# Altium PCB PCB1.PcbDoc (part 1 of 7)
Units mil, origin at the board's own origin, x right, y up, seen from the top; angles counter-clockwise.
Board outline 2100 x 2700 mil, 6 copper layers (Top Layer, Layer 2, Layer 3, Layer 4, Layer 5, Bottom Layer), stack 32.112 mil thick; 200 components, 319 nets, 1280 pads, 807 vias.
Unrouted connection lines stored in the file: 4.
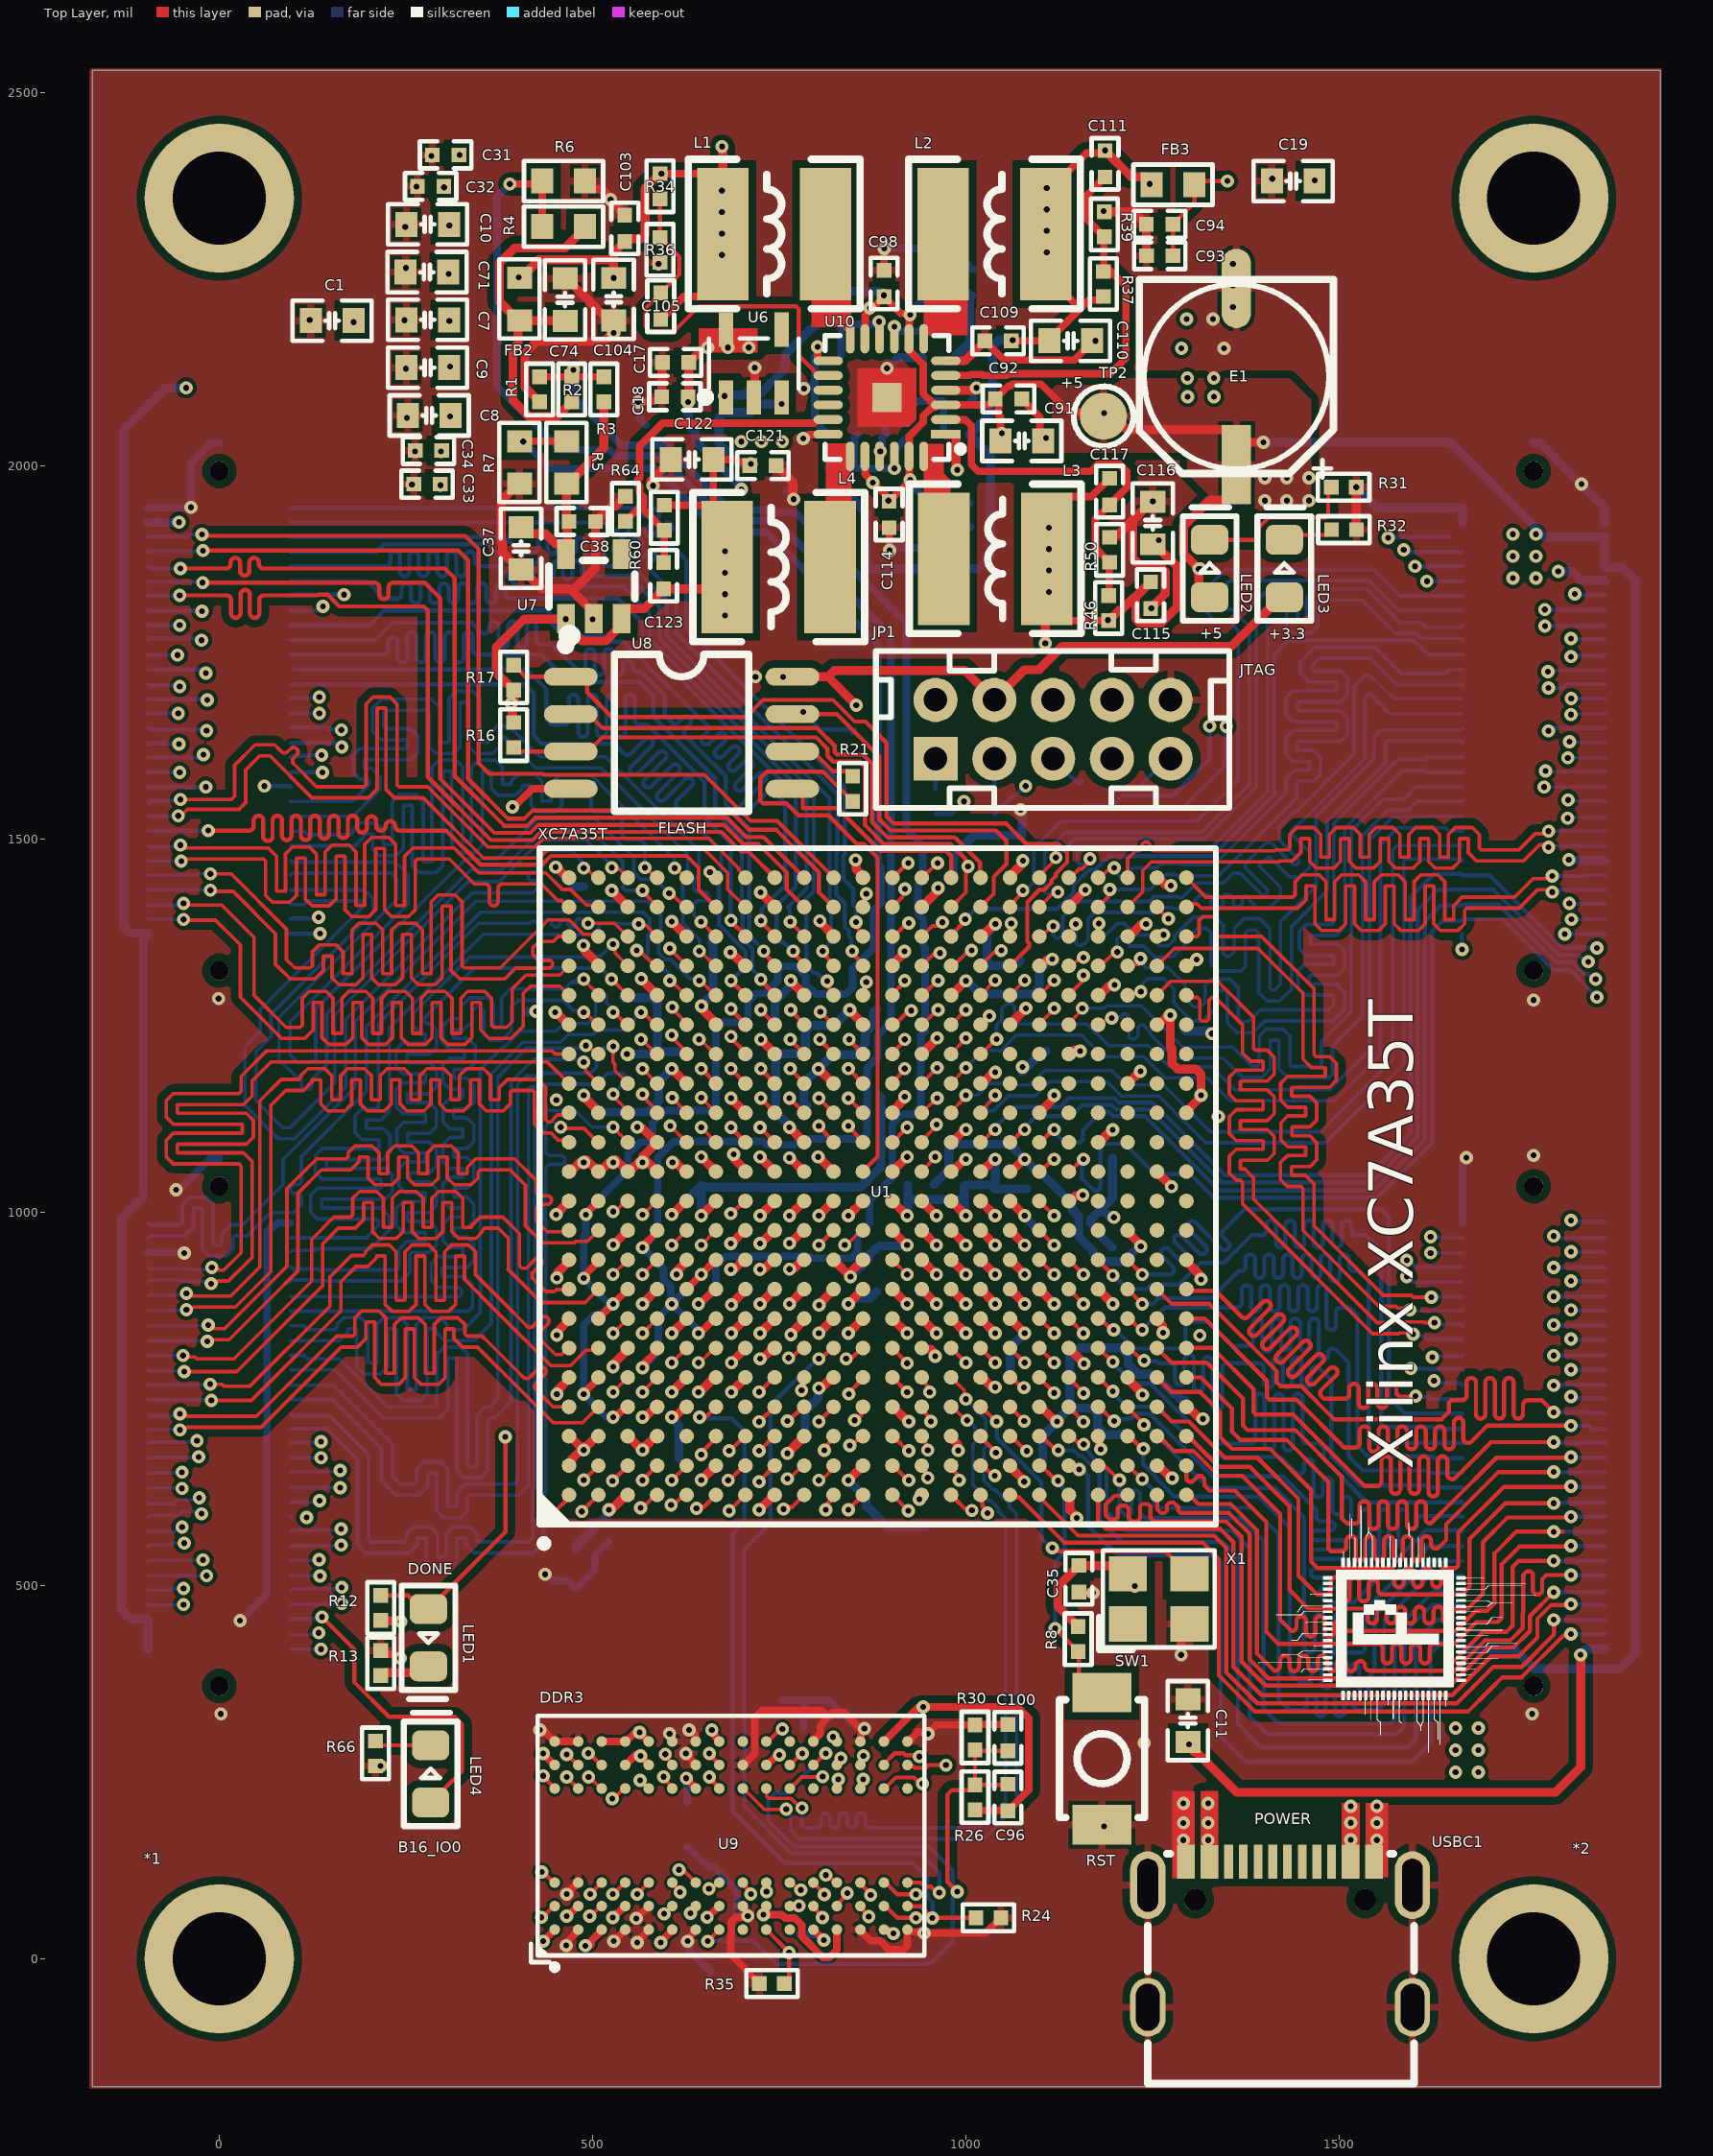
[diagram p0: Top Layer view]
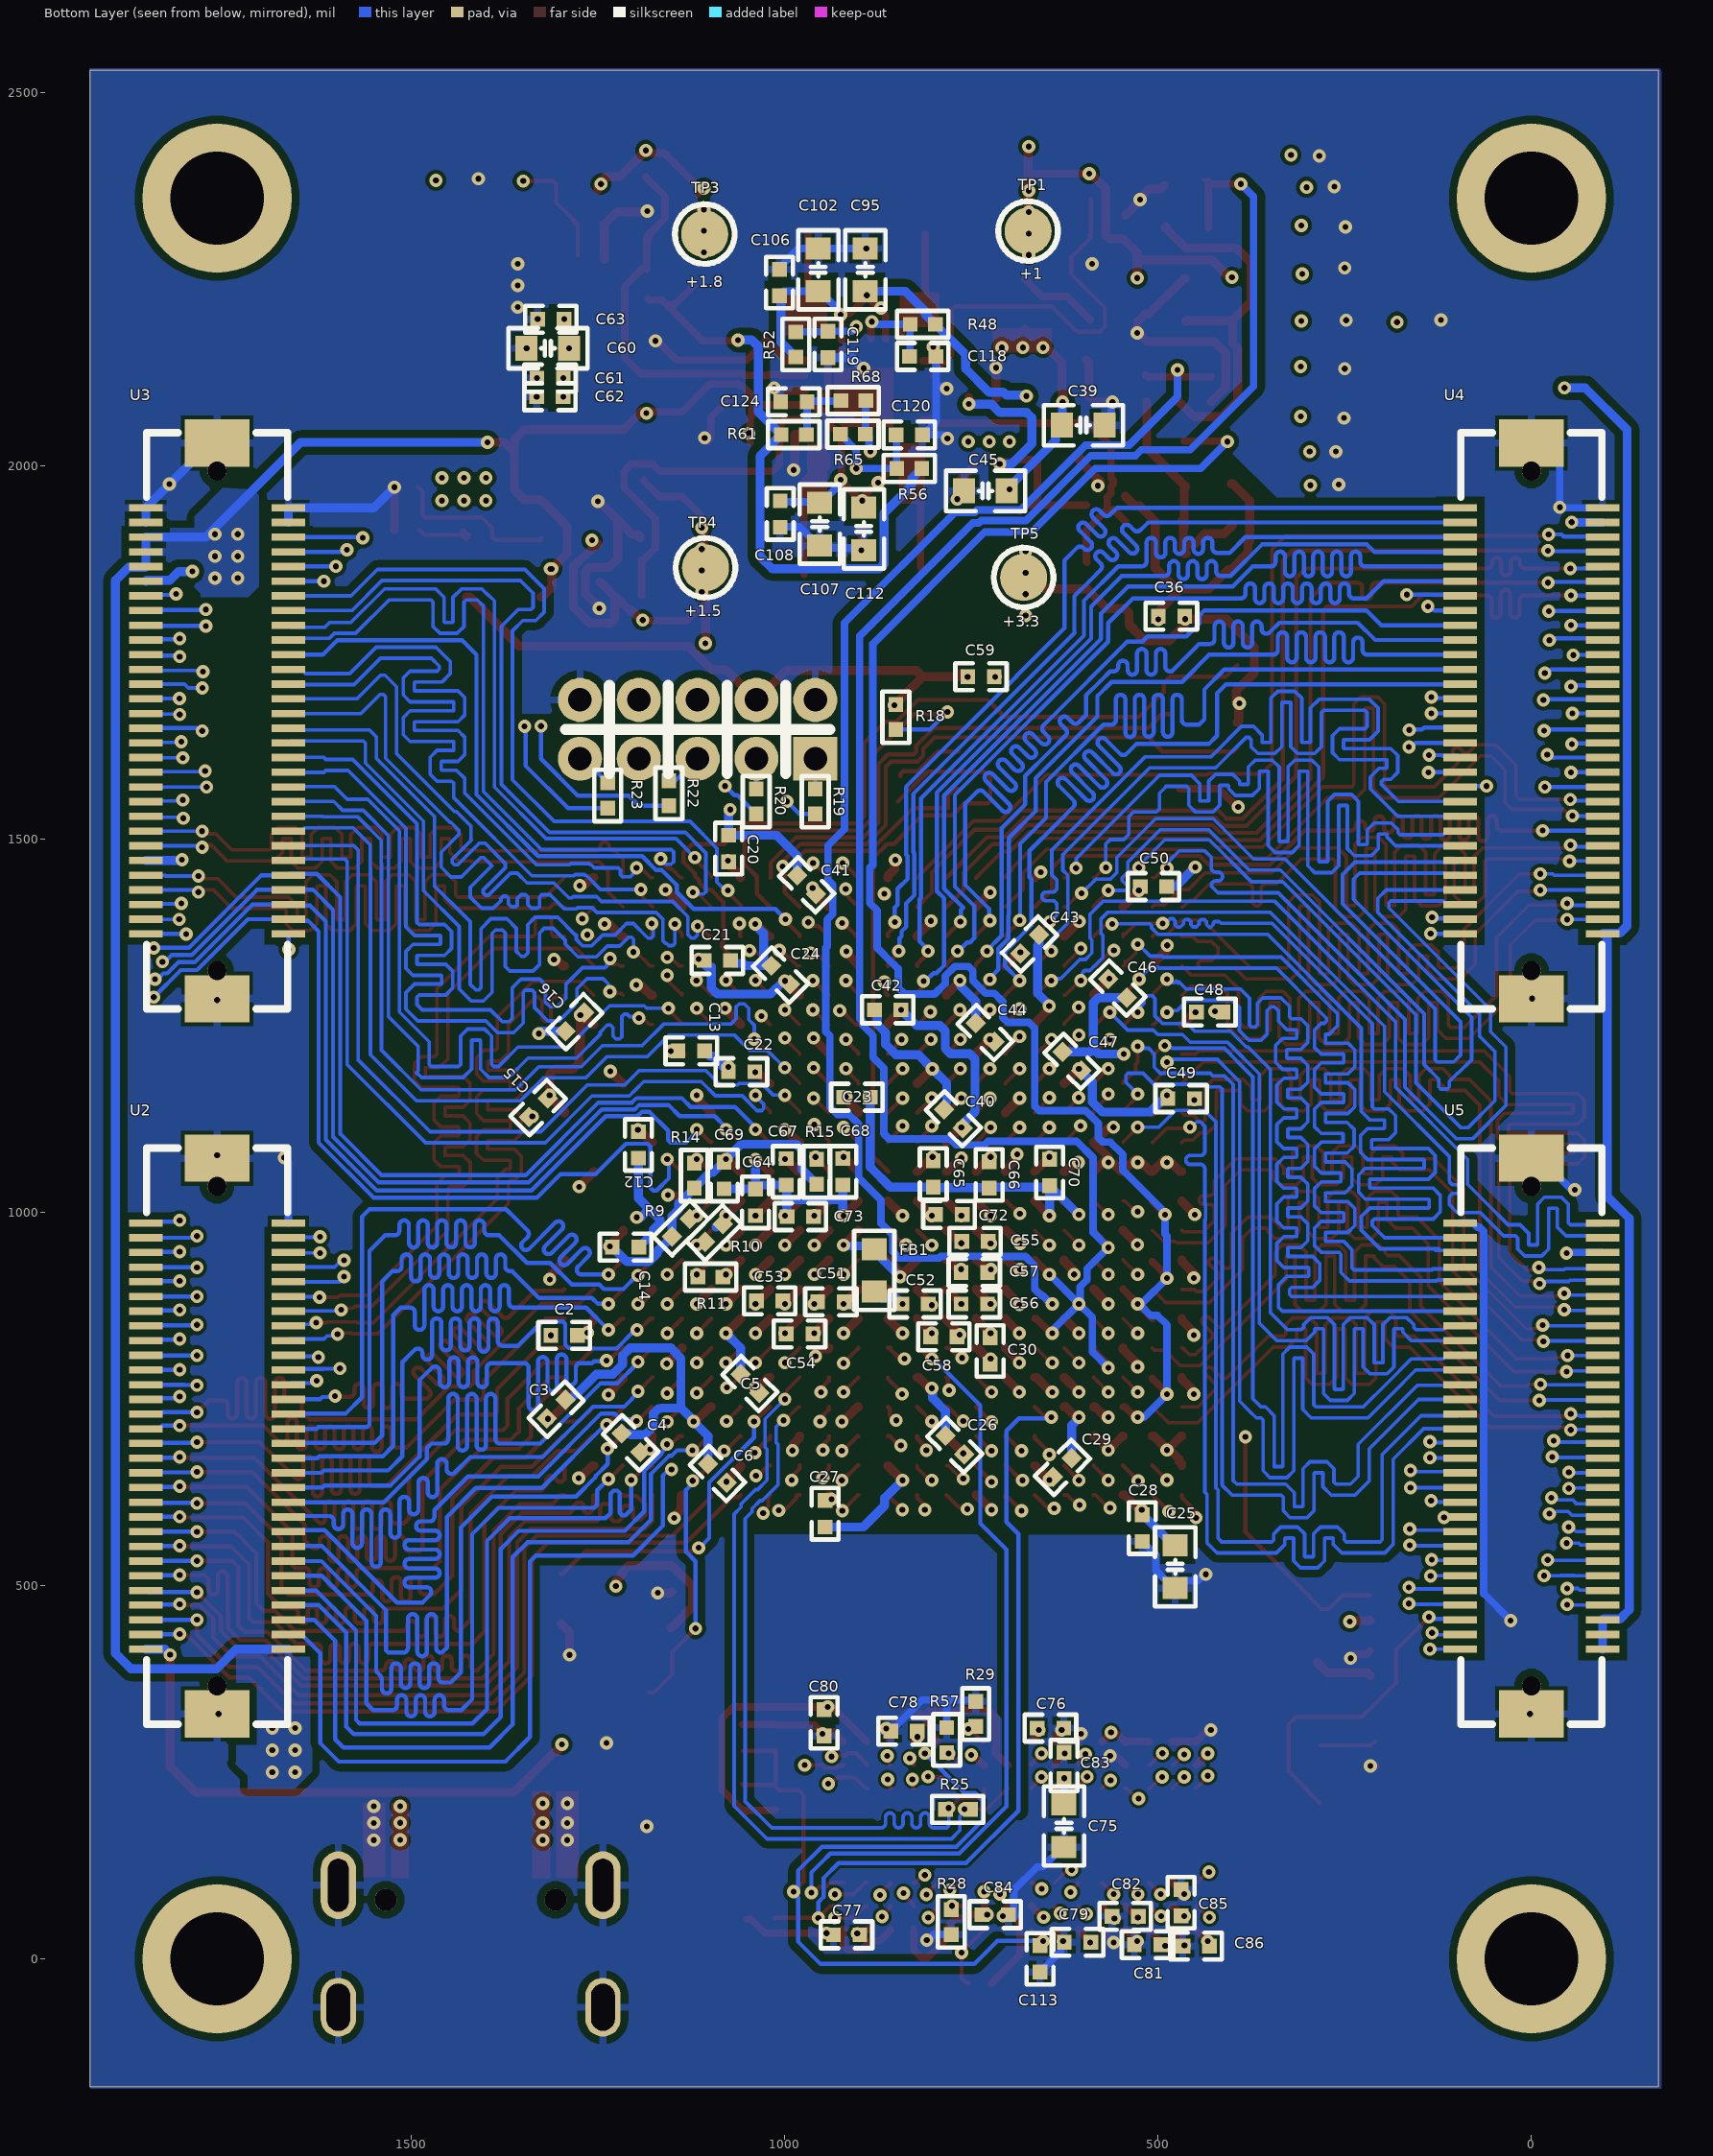
[diagram p1: Bottom Layer view, seen from below]
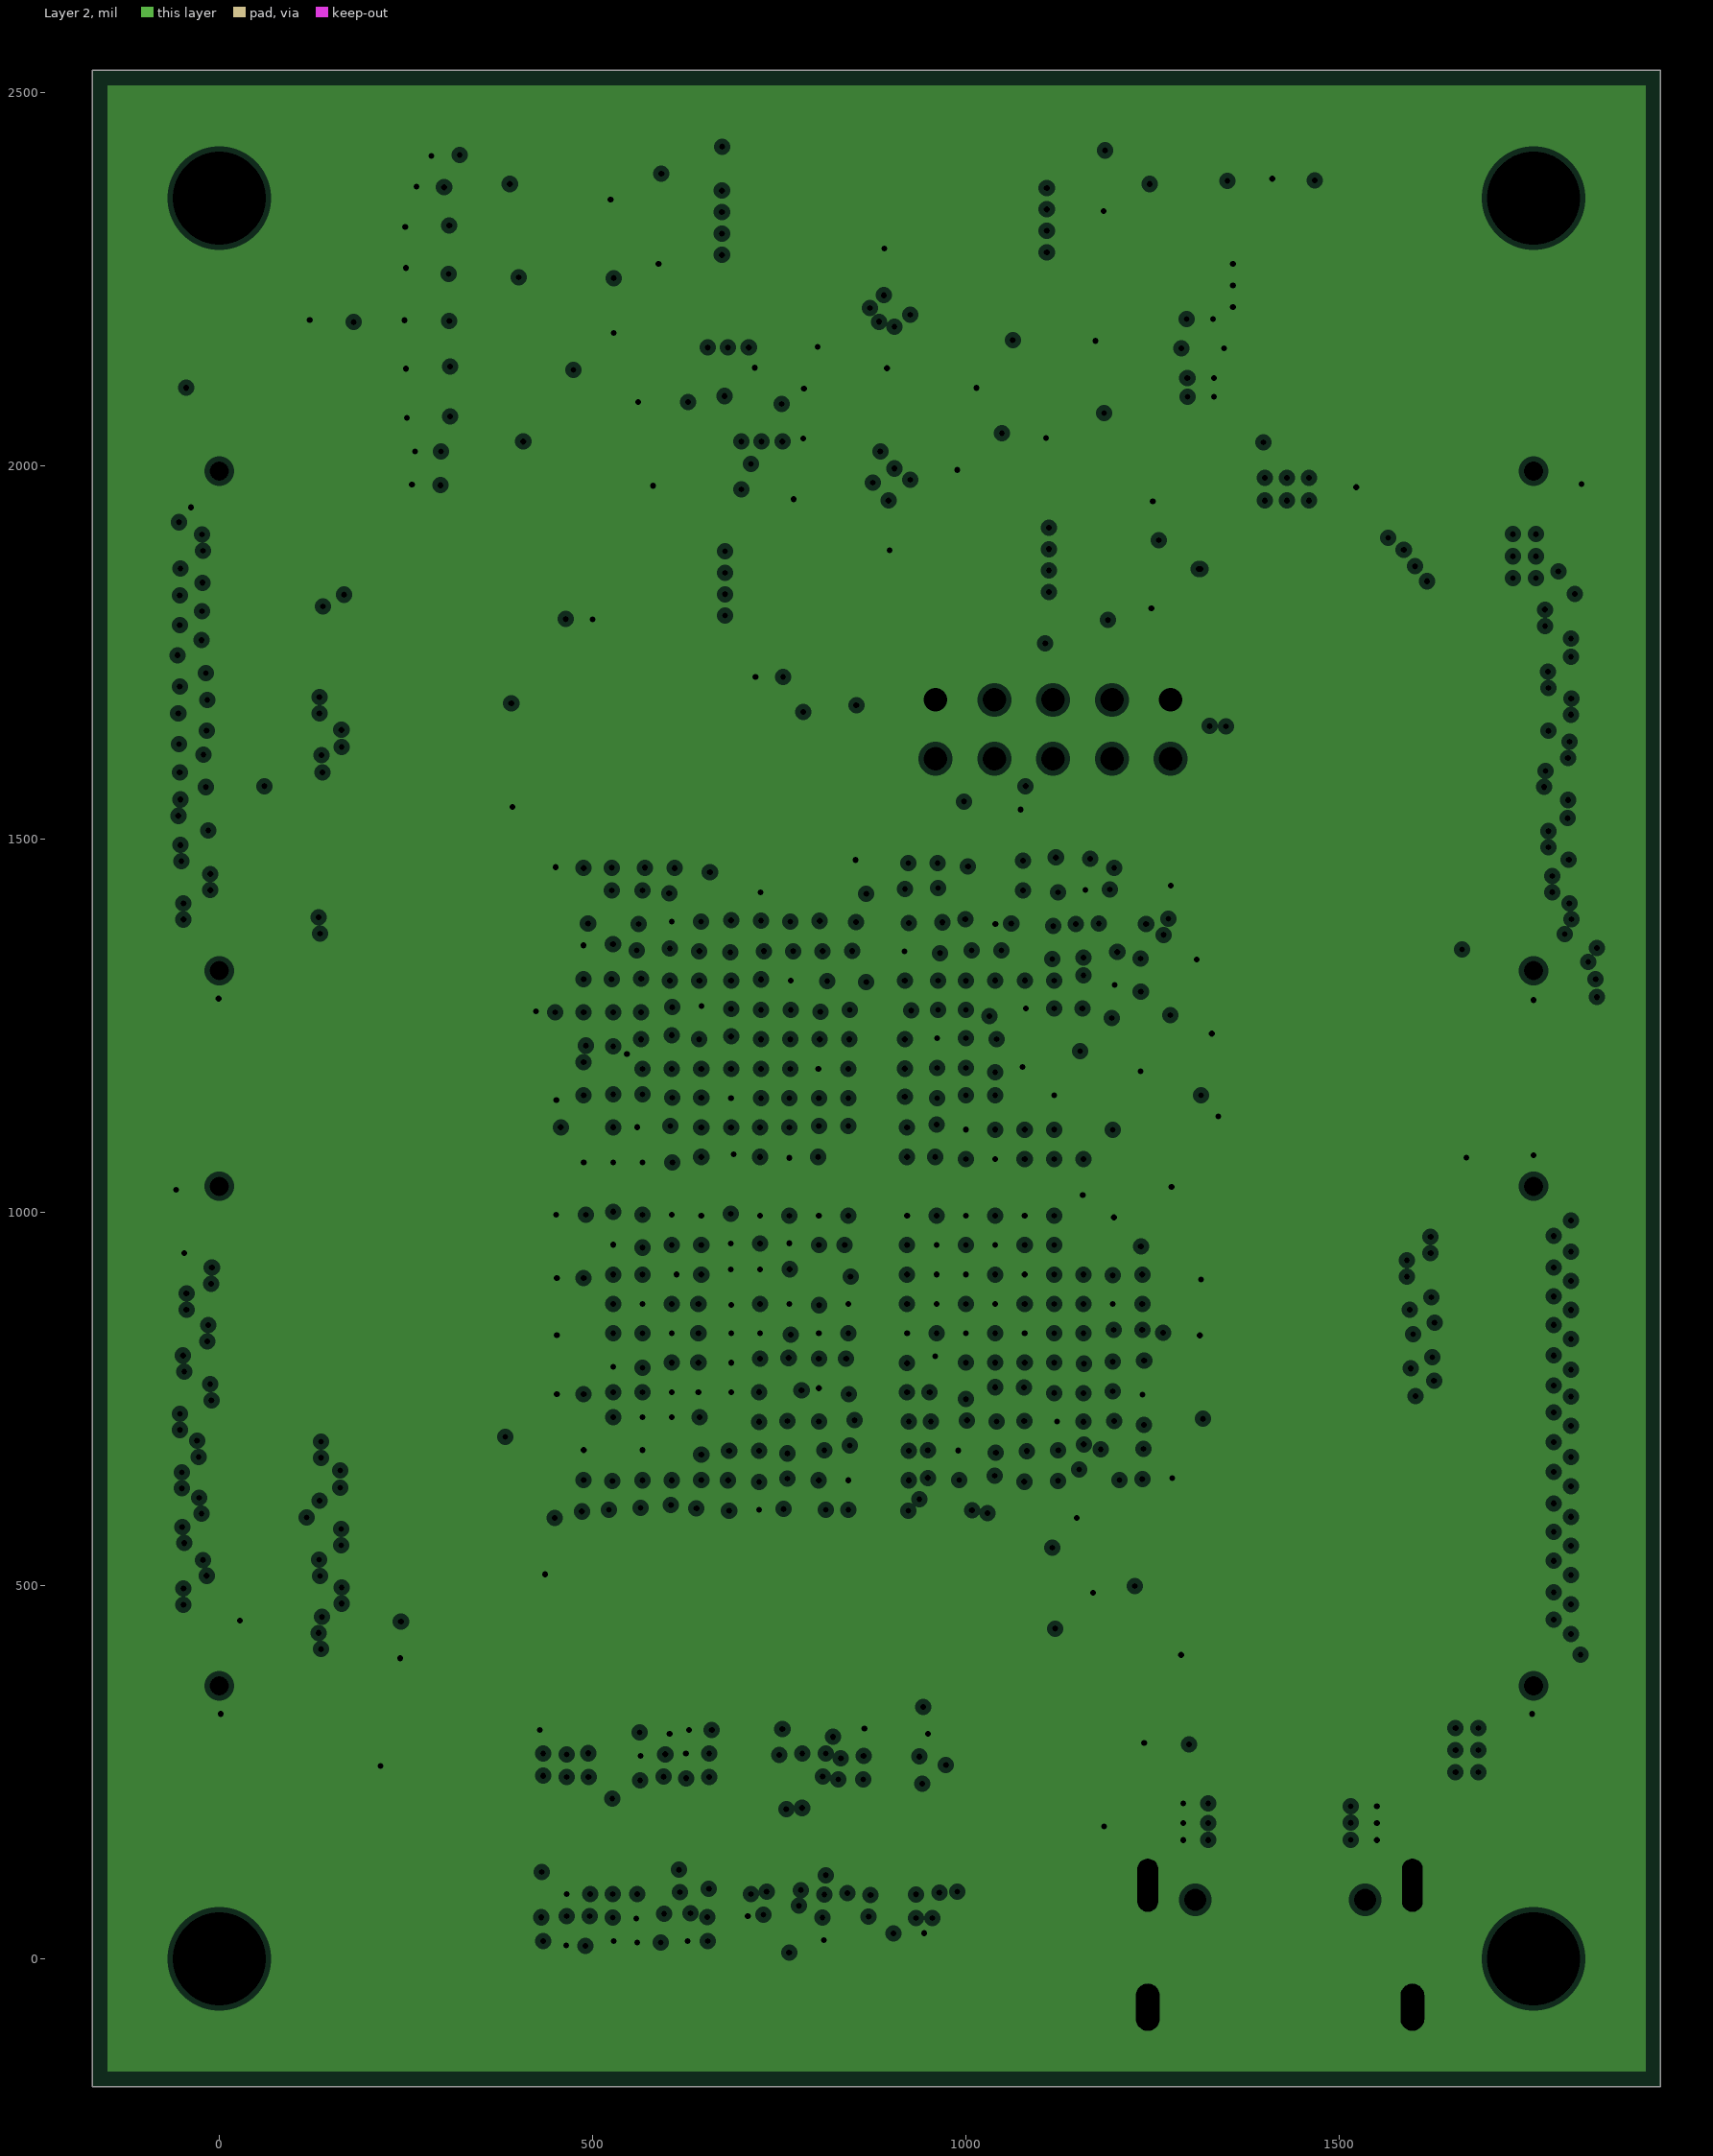
[diagram p2: Layer 2, clearances drawn from the general rule]
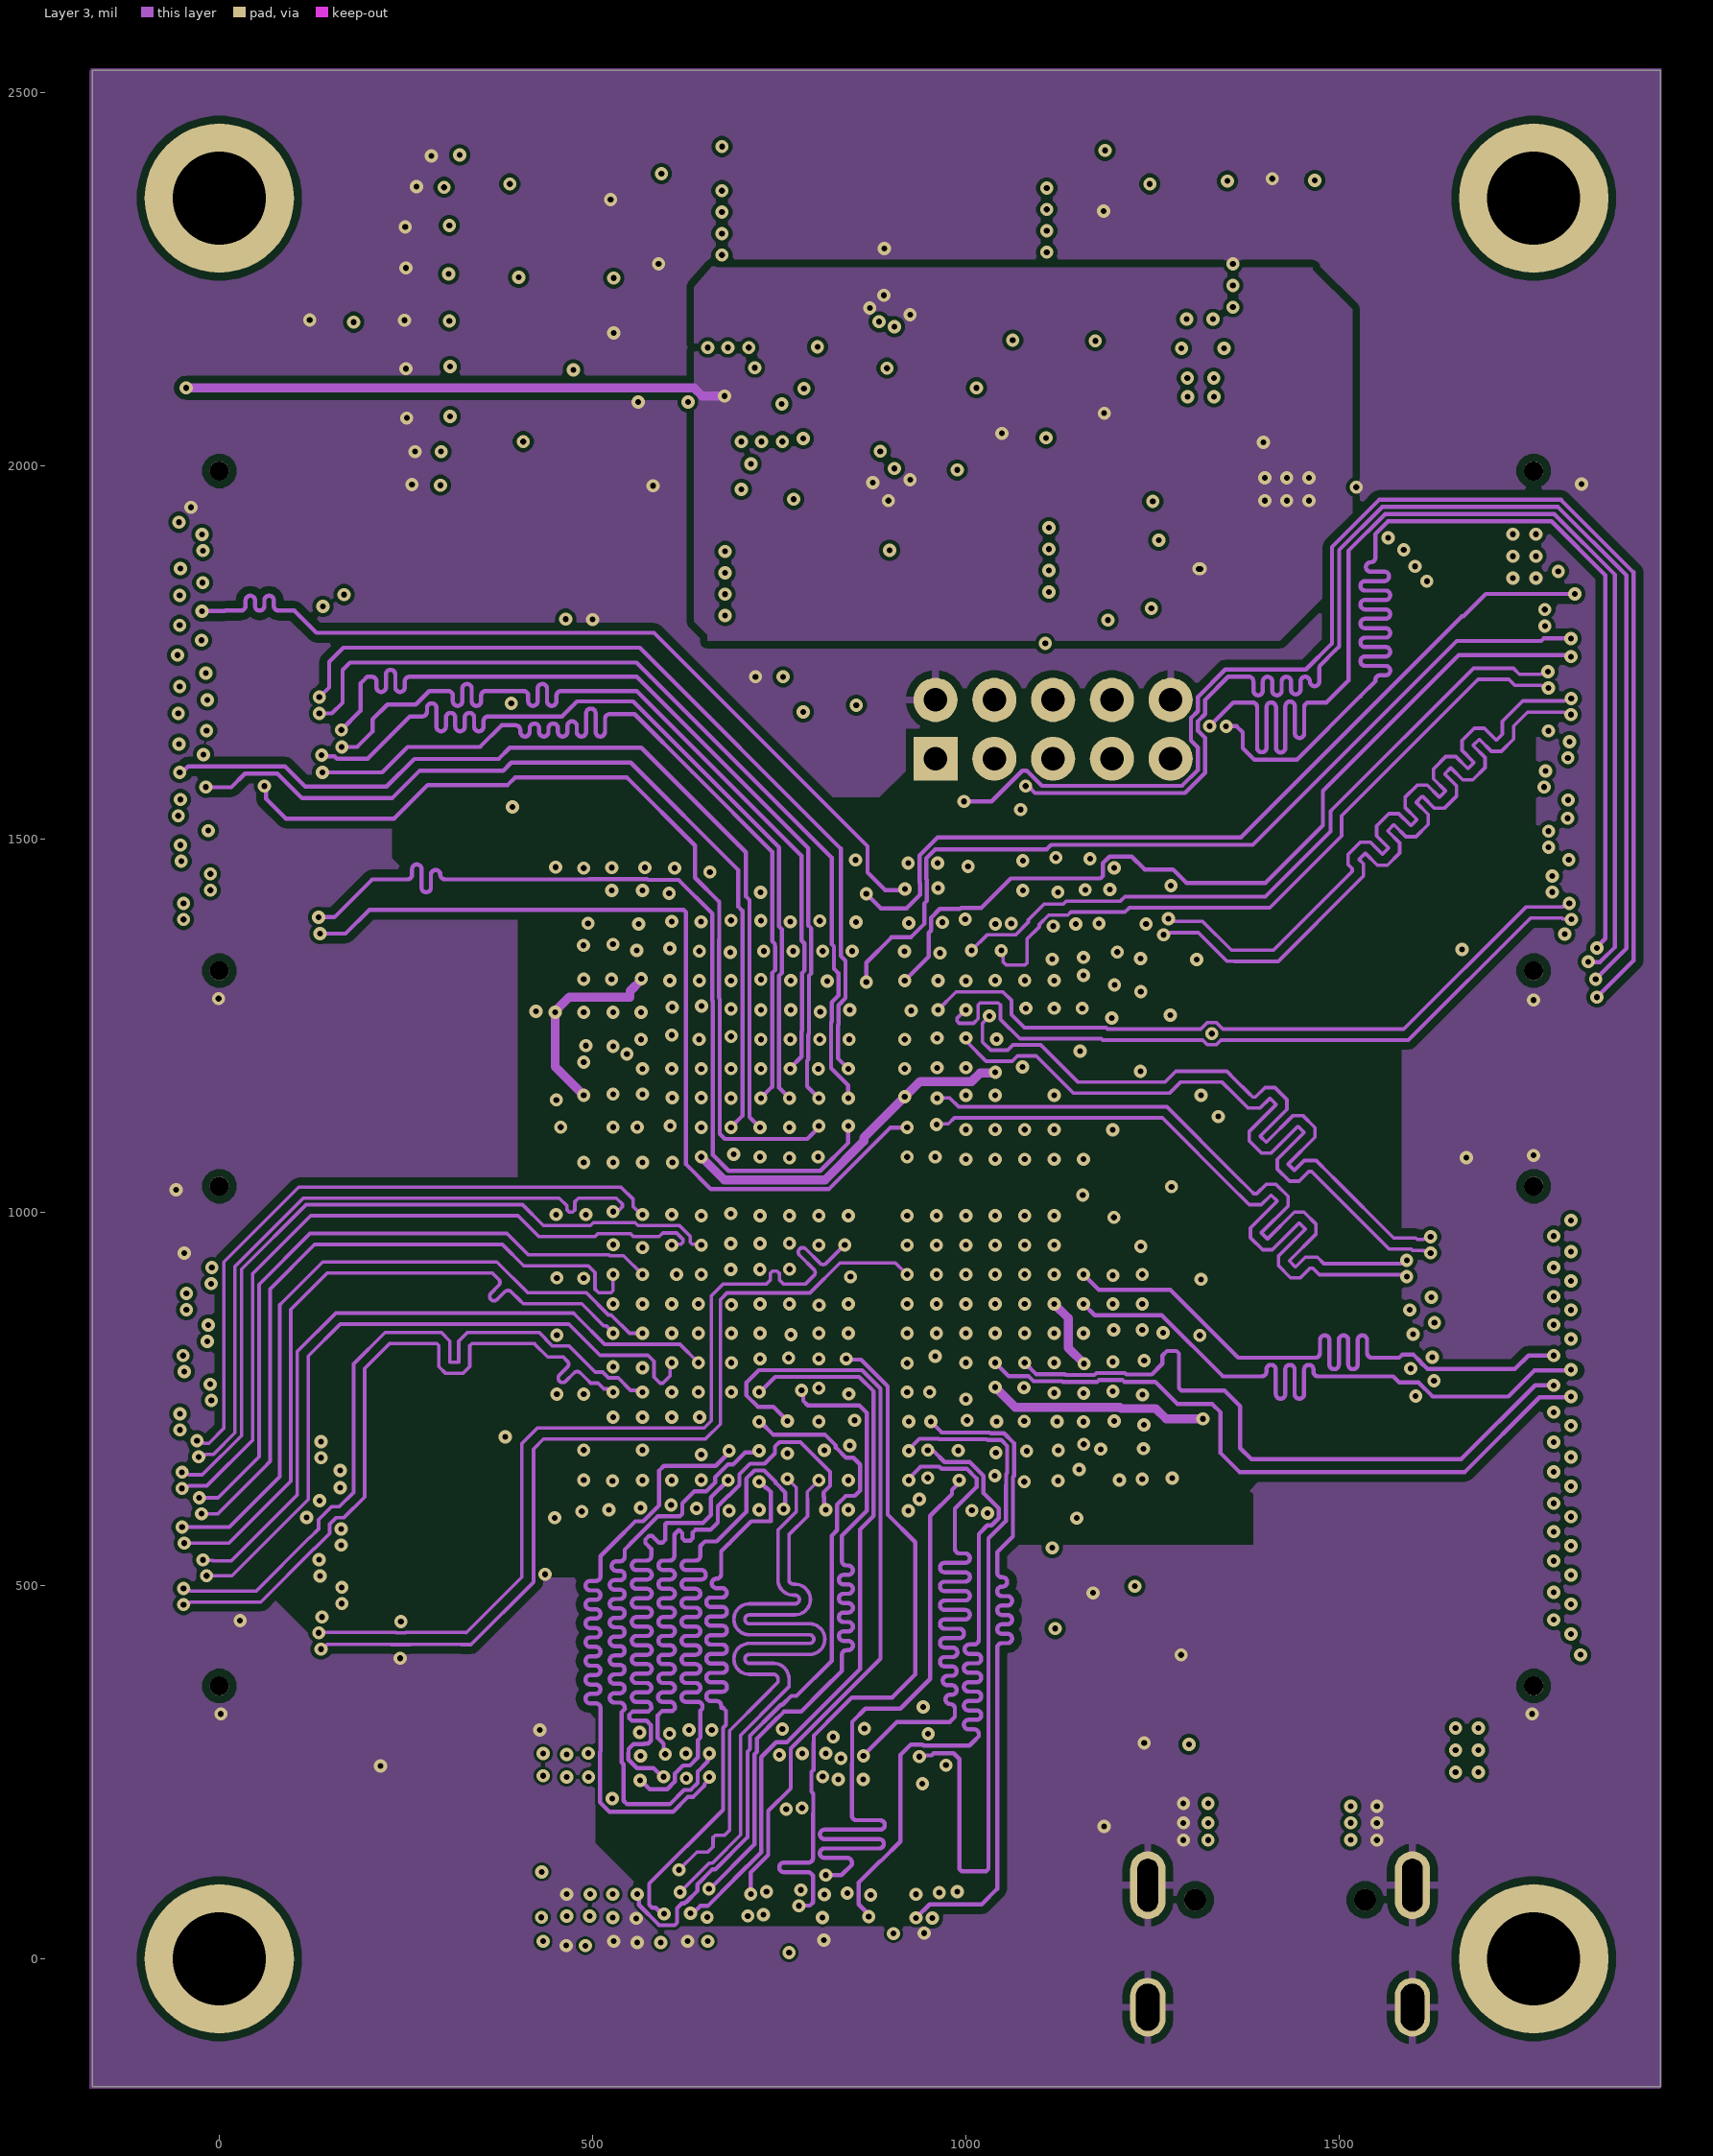
[diagram p3: Layer 3]
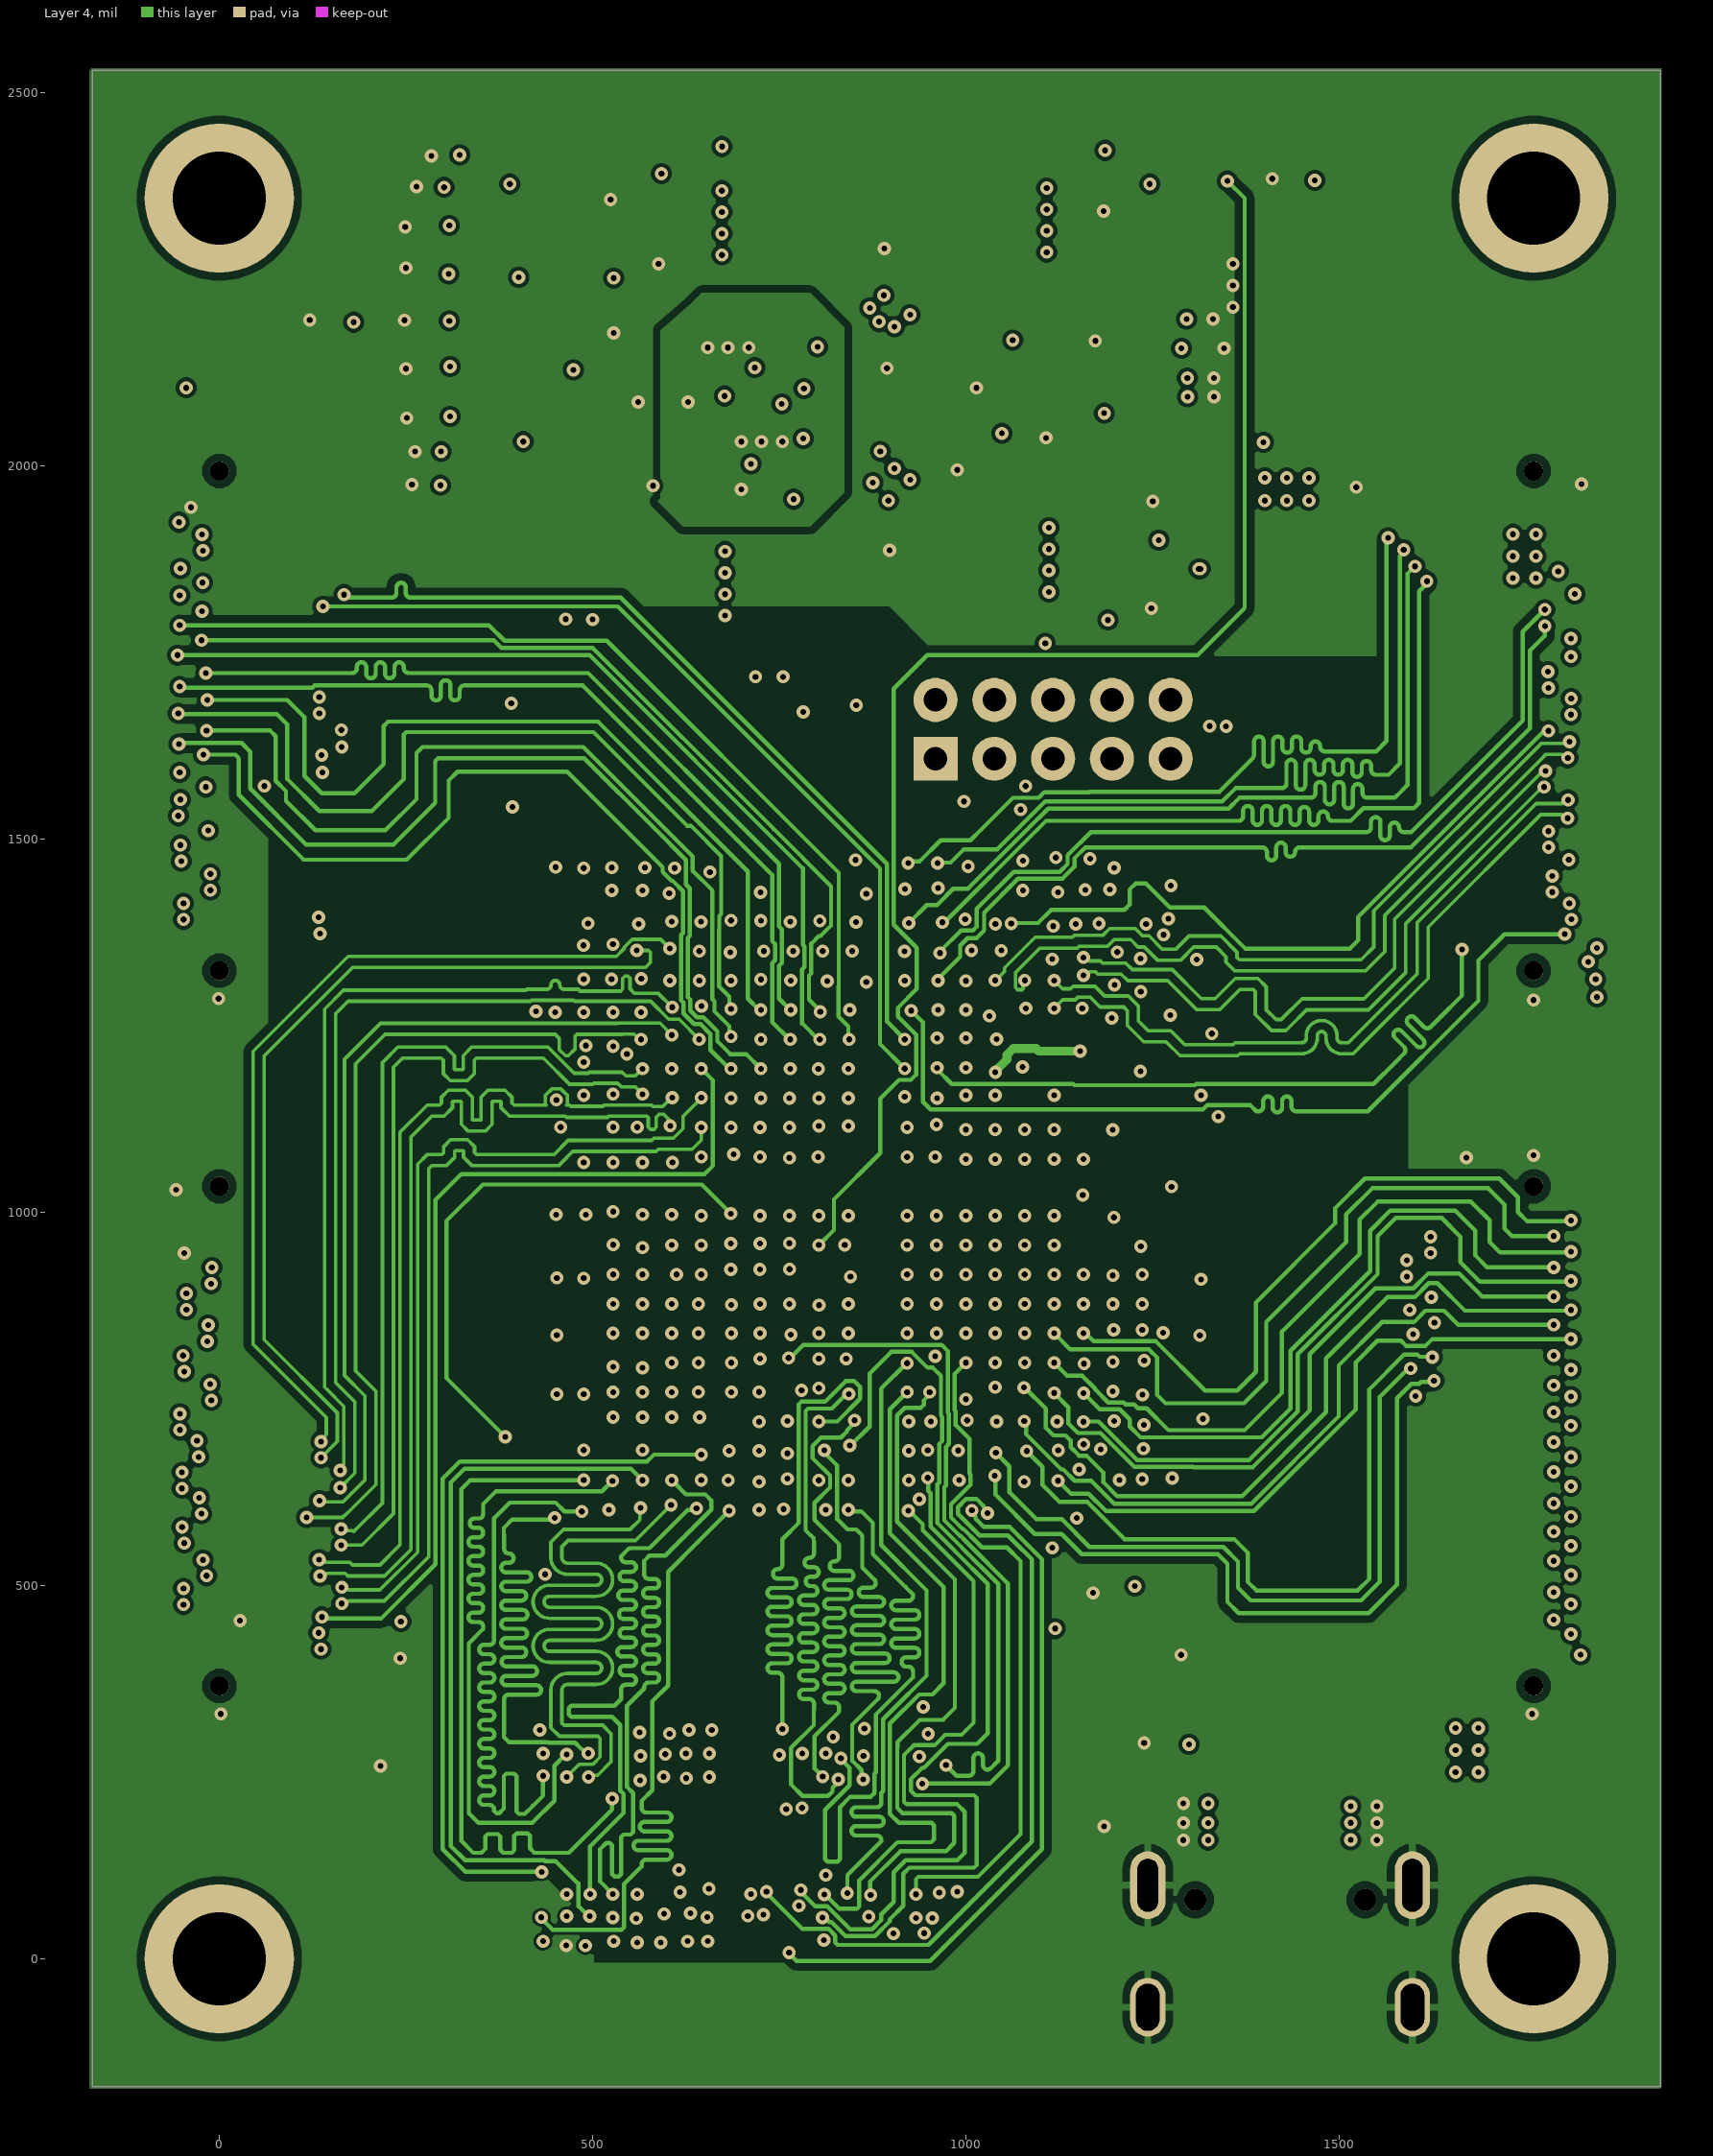
[diagram p4: Layer 4]
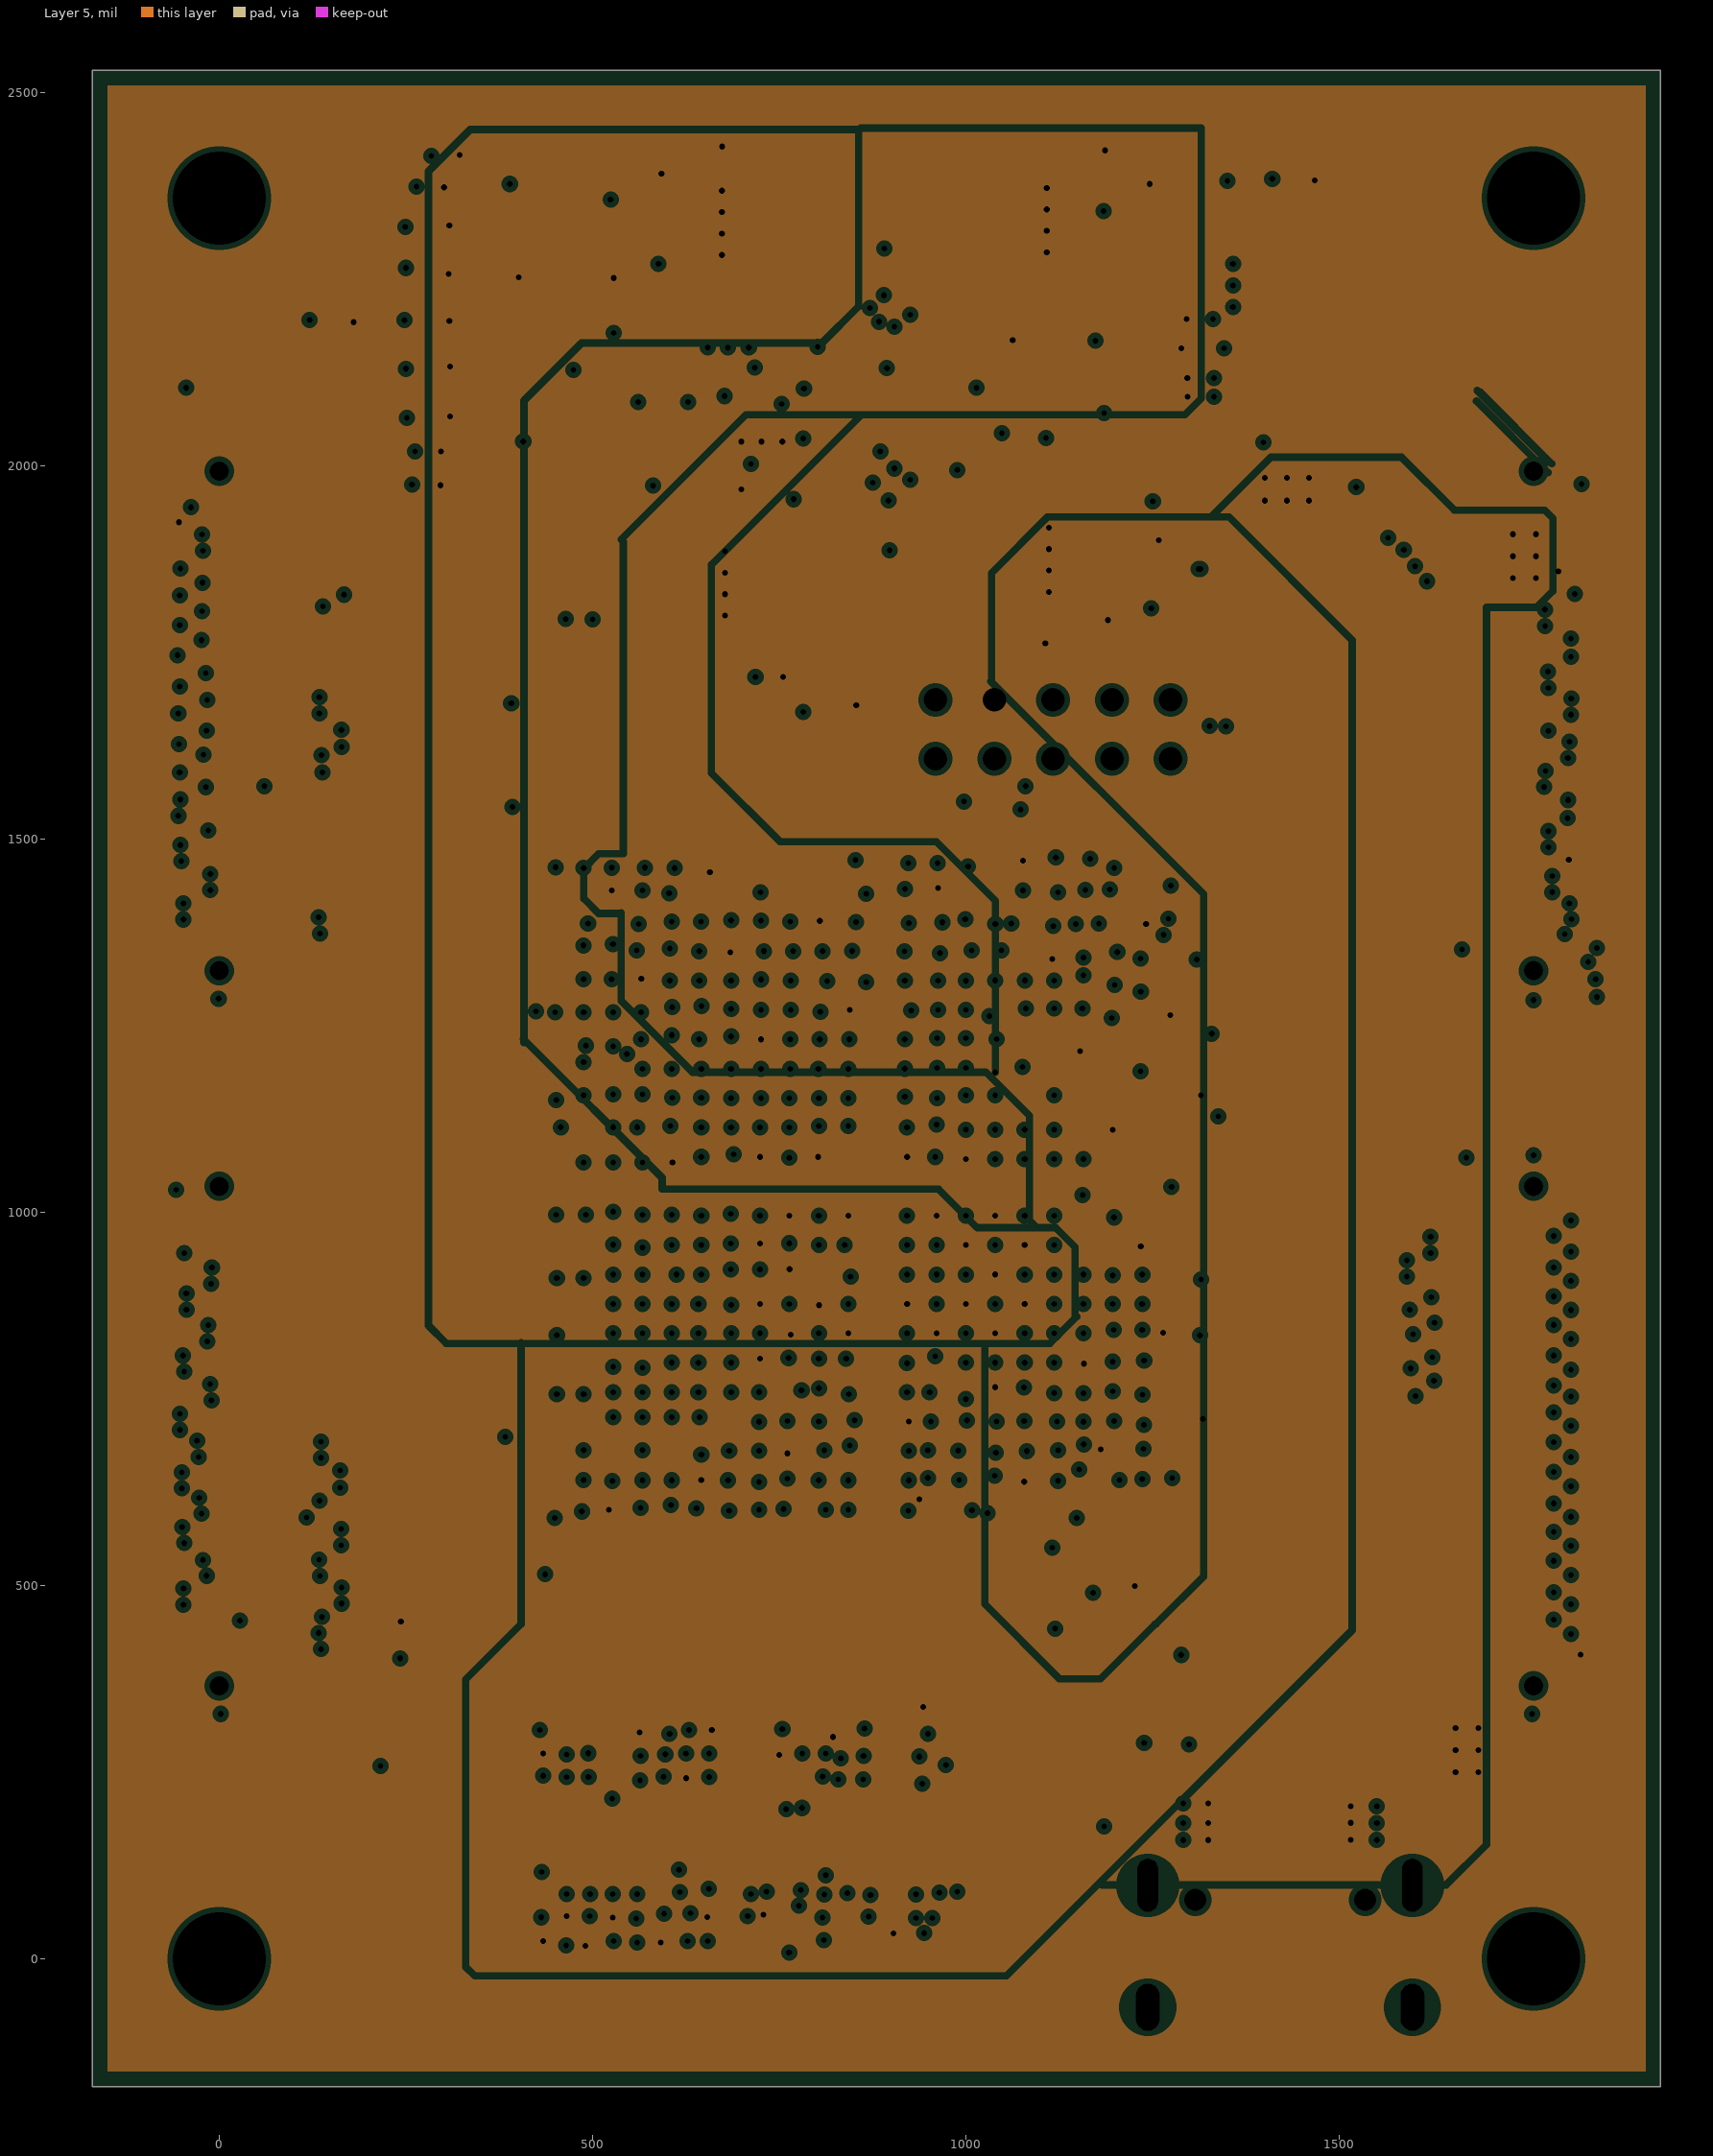
[diagram p5: Layer 5, clearances drawn from the general rule]
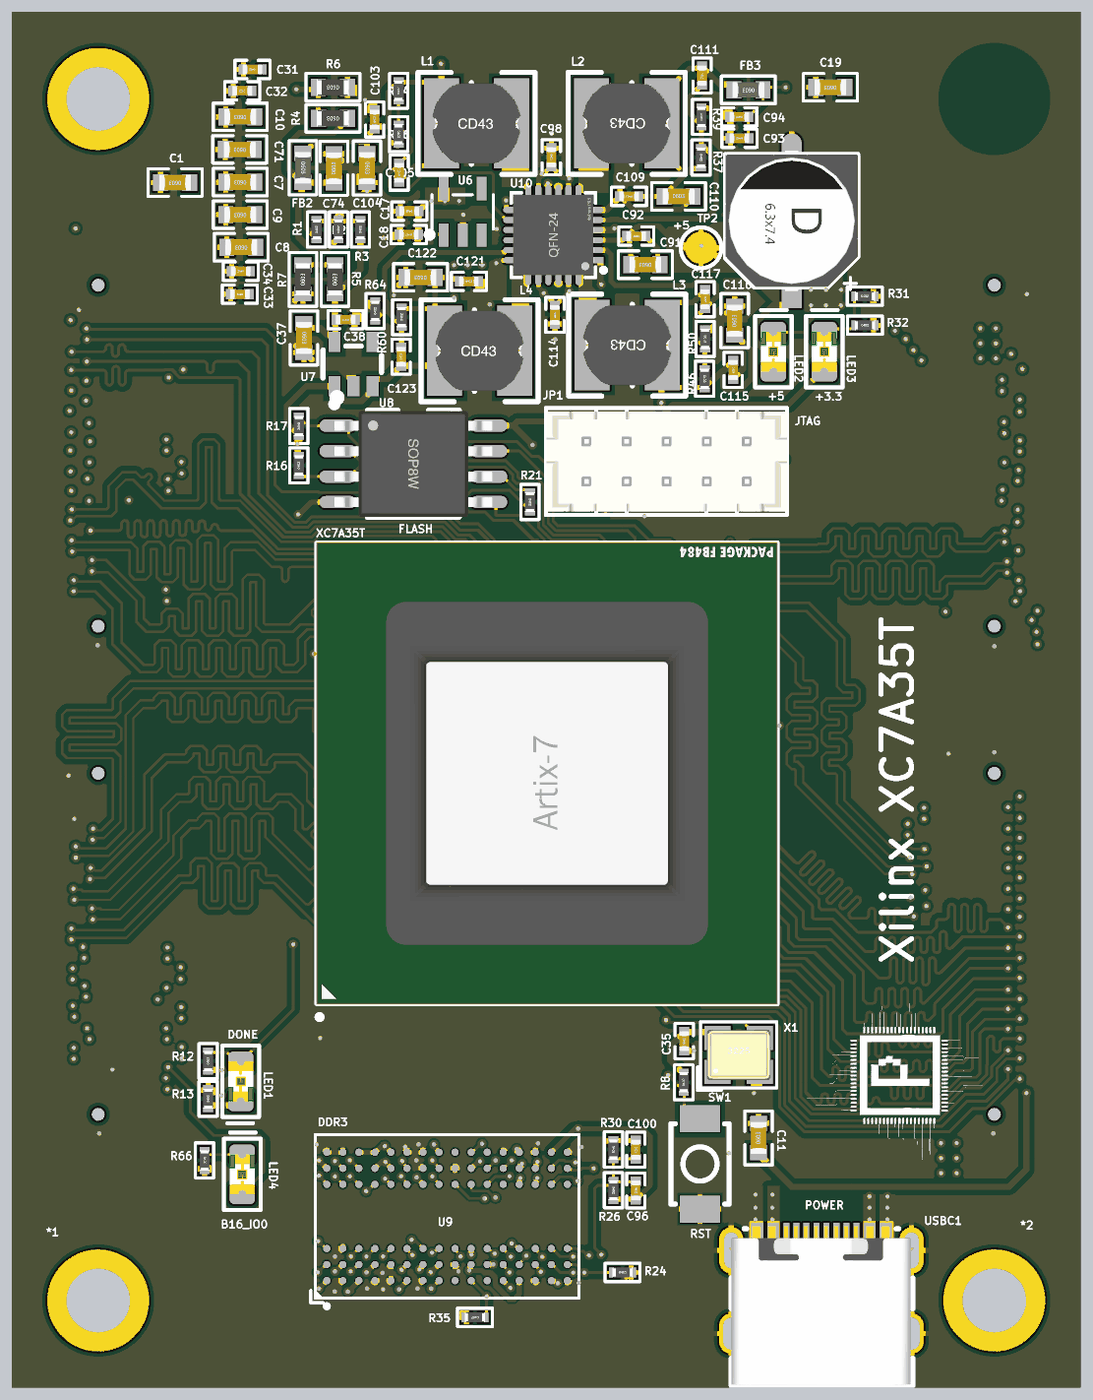
[diagram p12: 3D render of the assembled board from above, using the file's embedded part models]
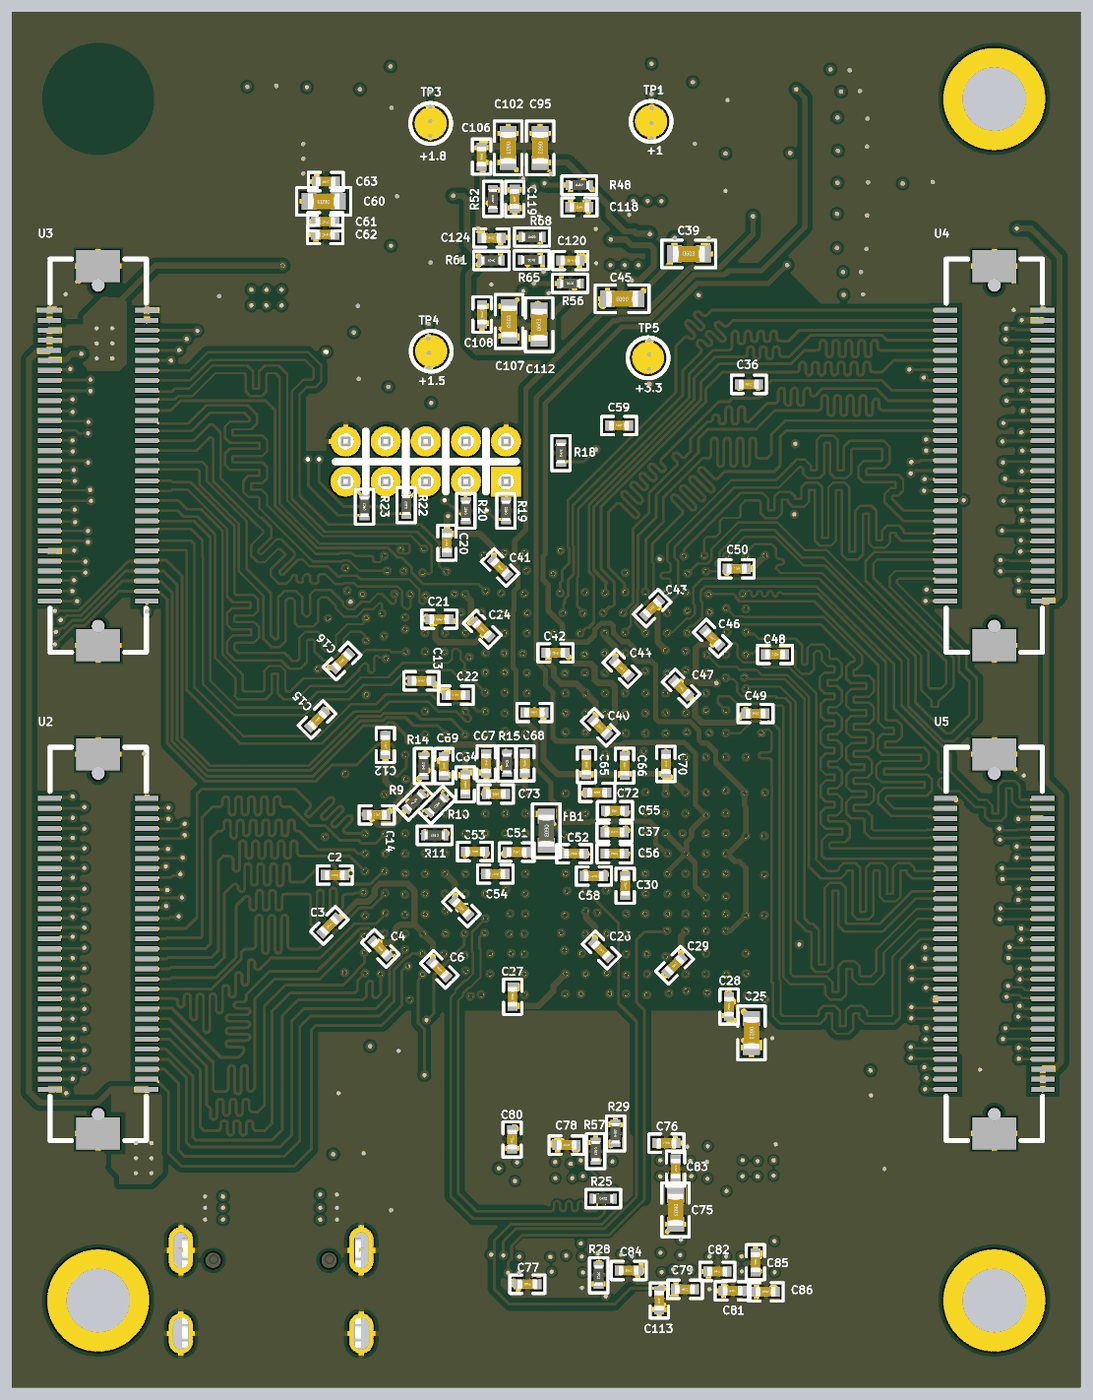
[diagram p13: 3D render of the assembled board from below, using the file's embedded part models]

## Layer stack, top to bottom
Top Solder: solder mask 0.4, Solder Resist, Dk 3.5
Top Layer: signal copper 1.4
Dielectric 4: prepreg 2.8, PP-006, Dk 4.1
Layer 2: plane copper 1.378, net GND
Dielectric 2: prepreg 2.8, PP-006, Dk 4.1
Layer 3: signal copper 1.378
Dielectric 1: dielectric 12.6, FR-4, Dk 4.8
Layer 4: signal copper 1.378
Dielectric 3: prepreg 2.8, PP-006, Dk 4.1
Layer 5: plane copper 1.378, net (Multiple Nets)
Dielectric 5: prepreg 2.8, PP-006, Dk 4.1
Bottom Layer: signal copper 1.4
Bottom Solder: solder mask 0.4, Solder Resist, Dk 3.5

## Board outline
-170,-171 -170,2529 1930,2529 1930,-171

## Design rules (kind name [scope] priority, off if disabled: settings)
Clearance room_bga [WithinRoom('room_fpga') or WithinRoom('room_ddr3')] p1: gap=3.5 ignorepadtopadclearanceinfootprint=FALSE
Clearance via_poly [IsVia vs InPoly] p2: gap=5 ignorepadtopadclearanceinfootprint=FALSE
Clearance poly [InPoly] p3: gap=10 ignorepadtopadclearanceinfootprint=FALSE
Clearance Clearance_all [All] p4: gap=4 ignorepadtopadclearanceinfootprint=FALSE
DiffPairsRouting 100ohm_diff [InDifferentialPairClass('ddr3') or InDifferentialPairClass('bank14') or InDifferentialPairClass('bank16') or InDifferentialPairClass('mgt') or InDifferentialPairClass('xadc')] p1: maxlimit=15 minlimit=5 mostfreqgap=10 toplayer_minwidth=4.77 toplayer_maxwidth=4.77 toplayer_prefwidth=4.77 midlayer1_minwidth=4.77 midlayer1_maxwidth=4.77 midlayer1_prefwidth=4.77 midlayer2_minwidth=4.77 midlayer2_maxwidth=4.77 midlayer2_prefwidth=4.77 bottomlayer_minwidth=4.77 bottomlayer_maxwidth=4.77 bottomlayer_prefwidth=4.77 maxuncoupledlength=200
PlaneClearance [All] p1: clearance=7
PlaneConnect [All] p1: planeconnectstyle=Direct reliefexpansion=20 reliefentries=4 reliefconductorwidth=10 reliefairgap=10
PolygonConnect [All] p1: thpad.connectstyle=Relief thpad.reliefconductorwidth=10 thpad.reliefentries=4 thpad.polygonreliefangle="90 Angle" thpad.airgapwidth=10 smdpad.connectstyle=Relief smdpad.reliefconductorwidth=10 smdpad.reliefentries=4 smdpad.polygonreliefangle="90 Angle" smdpad.airgapwidth=5 via.connectstyle=Direct via.reliefconductorwidth=10 via.reliefentries=4 via.polygonreliefangle="90 Angle" via.airgapwidth=10
RoomDefinition room_fpga [False] p1: confinementstyle=ConfineIn formatcopy=TRUE lockcomponents=FALSE outline 405,1513 1360,1513 1360,558 405,558
RoomDefinition room_ddr3 [False] p2: confinementstyle=ConfineIn formatcopy=TRUE lockcomponents=FALSE outline 420,333 950,333 950,-2 420,-2
RoutingVias [All] p1: holewidth=7.9 width=17.7 viastyle="Through Hole" minholewidth=7.9 minwidth=17.7 maxholewidth=7.9 maxwidth=17.7
SolderMaskExpansion [All] p1: expansion=4 istentingtop=FALSE
Width ddr3 [InNetClass('ddr3_high_data') or InNetClass('ddr3_low_data') or InNetClass('ddr3_other')] p1: maxlimit=5.61 minlimit=5.61 preferedwidth=5.61
Width power [InNetClass('power')] p2: maxlimit=14 minlimit=10 preferedwidth=12
Width [All] p3: maxlimit=14 minlimit=5 preferedwidth=5.61
27 further rules are at their usual default settings.

## Classes and differential pairs
net class mgt: MGT_CLK0_N MGT_CLK0_P MGT_CLK1_N MGT_CLK1_P MGT_RX_N_0 MGT_RX_N_1 MGT_RX_N_2 MGT_RX_N_3 MGT_RX_P_0 MGT_RX_P_1 MGT_RX_P_2 MGT_RX_P_3 MGT_TX_N_0 MGT_TX_N_1 MGT_TX_N_2 MGT_TX_N_3 MGT_TX_P_0 MGT_TX_P_1 MGT_TX_P_2 MGT_TX_P_3
net class jtag: FPGA_TCK FPGA_TDI FPGA_TDO FPGA_TMS
net class bank34: B34_IO0 B34_IO25 B34_N_L1 B34_N_L2 B34_N_L3 B34_N_L4 B34_N_L5 B34_N_L6 B34_N_L7 B34_N_L8 B34_N_L9 B34_N_L10 B34_N_L11 B34_N_L12 B34_N_L13 B34_N_L14 B34_N_L15 B34_N_L16 B34_N_L17 B34_N_L18 B34_N_L19 B34_N_L20 B34_N_L21 B34_N_L22 B34_N_L23 B34_N_L24 B34_P_L1 B34_P_L3 B34_P_L4 B34_P_L5 B34_P_L6 B34_P_L7 B34_P_L8 B34_P_L9 B34_P_L10 B34_P_L11 B34_P_L12 B34_P_L14 B34_P_L15 B34_P_L16 B34_P_L17 B34_P_L18 B34_P_L19 B34_P_L20 B34_P_L21 B34_P_L22 B34_P_L23 B34_P_L24
net class bank16: B16_IO0 B16_IO25 B16_N_L1 B16_N_L2 B16_N_L3 B16_N_L4 B16_N_L5 B16_N_L6 B16_N_L7 B16_N_L8 B16_N_L9 B16_N_L10 B16_N_L11 B16_N_L12 B16_N_L13 B16_N_L14 B16_N_L15 B16_N_L16 B16_N_L17 B16_N_L18 B16_N_L19 B16_N_L20 B16_N_L21 B16_N_L22 B16_N_L23 B16_N_L24 B16_P_L1 B16_P_L2 B16_P_L3 B16_P_L4 B16_P_L5 B16_P_L6 B16_P_L7 B16_P_L8 B16_P_L9 B16_P_L10 B16_P_L11 B16_P_L12 B16_P_L13 B16_P_L14 B16_P_L15 B16_P_L16 B16_P_L17 B16_P_L18 B16_P_L19 B16_P_L20 B16_P_L21 B16_P_L22 B16_P_L23 B16_P_L24
net class bank14: B14_IO0 B14_IO25 B14_N_L3 B14_N_L4 B14_N_L5 B14_N_L6 B14_N_L7 B14_N_L8 B14_N_L9 B14_N_L10 B14_N_L11 B14_N_L12 B14_N_L13 B14_N_L14 B14_N_L15 B14_N_L16 B14_N_L17 B14_N_L18 B14_N_L19 B14_N_L20 B14_N_L21 B14_N_L22 B14_N_L23 B14_N_L24 B14_P_L3 B14_P_L4 B14_P_L5 B14_P_L7 B14_P_L8 B14_P_L9 B14_P_L10 B14_P_L11 B14_P_L12 B14_P_L13 B14_P_L14 B14_P_L15 B14_P_L16 B14_P_L17 B14_P_L18 B14_P_L19 B14_P_L20 B14_P_L21 B14_P_L22 B14_P_L23 B14_P_L24
net class bank15: B15_IO0 B15_IO25 B15_N_L1 B15_N_L2 B15_N_L3 B15_N_L4 B15_N_L5 B15_N_L6 B15_N_L7 B15_N_L8 B15_N_L9 B15_N_L10 B15_N_L11 B15_N_L12 B15_N_L13 B15_N_L14 B15_N_L15 B15_N_L16 B15_N_L17 B15_N_L18 B15_N_L19 B15_N_L20 B15_N_L21 B15_N_L22 B15_N_L23 B15_N_L24 B15_P_L1 B15_P_L2 B15_P_L3 B15_P_L4 B15_P_L5 B15_P_L6 B15_P_L7 B15_P_L8 B15_P_L9 B15_P_L10 B15_P_L11 B15_P_L12 B15_P_L13 B15_P_L14 B15_P_L15 B15_P_L16 B15_P_L17 B15_P_L18 B15_P_L19 B15_P_L20 B15_P_L21 B15_P_L22 B15_P_L23 B15_P_L24
differential pair class xadc: D_XADC_V
differential pair class mgt: D_MGT_CLK0 D_MGT_CLK1 D_MGT_RX_0 D_MGT_RX_1 D_MGT_RX_2 D_MGT_RX_3 D_MGT_TX_0 D_MGT_TX_1 D_MGT_TX_2 D_MGT_TX_3
differential pair class bank14: D_B14_L3 D_B14_L4 D_B14_L5 D_B14_L7 D_B14_L8 D_B14_L9 D_B14_L10 D_B14_L11 D_B14_L12 D_B14_L13 D_B14_L14 D_B14_L15 D_B14_L16 D_B14_L17 D_B14_L18 D_B14_L19 D_B14_L20 D_B14_L21 D_B14_L22 D_B14_L23 D_B14_L24
differential pair class bank16: D_B16_L1 D_B16_L2 D_B16_L3 D_B16_L4 D_B16_L5 D_B16_L6 D_B16_L7 D_B16_L8 D_B16_L9 D_B16_L10 D_B16_L11 D_B16_L12 D_B16_L13 D_B16_L14 D_B16_L15 D_B16_L16 D_B16_L17 D_B16_L18 D_B16_L19 D_B16_L20 D_B16_L21 D_B16_L22 D_B16_L23 D_B16_L24
differential pair class ddr3: ddr3_clk ddr3_dqs0 ddr3_dqs1
net class ddr3_high_data: DDR3_DQ8 DDR3_DQ9 DDR3_DQ10 DDR3_DQ11 DDR3_DQ12 DDR3_DQ13 DDR3_DQ14 DDR3_DQ15 DDR3_DQS_N1 DDR3_DQS_P1 DDR3_UDM
net class ddr3_low_data: DDR3_DQ0 DDR3_DQ1 DDR3_DQ2 DDR3_DQ3 DDR3_DQ4 DDR3_DQ5 DDR3_DQ6 DDR3_DQ7 DDR3_DQS_N0 DDR3_DQS_P0 DDR3_LDM
net class ddr3_other: DDR3_A0 DDR3_A1 DDR3_A2 DDR3_A3 DDR3_A4 DDR3_A5 DDR3_A6 DDR3_A7 DDR3_A8 DDR3_A9 DDR3_A10 DDR3_A11 DDR3_A12 DDR3_A13 DDR3_BA0 DDR3_BA1 DDR3_BA2 DDR3_CAS_N DDR3_CKE DDR3_CLK_N DDR3_CLK_P DDR3_CS_N DDR3_ODT DDR3_RAS_N DDR3_RESET_N DDR3_WE_N
net class power: +1 +1.5 +1.8 +3.3 +3.3_B +5 AGND GND MGTAVCC MGTAVTT
differential pair D_XADC_V: +XADC_V_P -XADC_V_N
differential pair D_B14_L3: +B14_P_L3 -B14_N_L3
differential pair D_B14_L4: +B14_P_L4 -B14_N_L4
differential pair D_B14_L5: +B14_P_L5 -B14_N_L5
differential pair D_B14_L7: +B14_P_L7 -B14_N_L7
differential pair D_B14_L8: +B14_P_L8 -B14_N_L8
differential pair D_B14_L9: +B14_P_L9 -B14_N_L9
differential pair D_B14_L10: +B14_P_L10 -B14_N_L10
differential pair D_B14_L11: +B14_P_L11 -B14_N_L11
differential pair D_B14_L12: +B14_P_L12 -B14_N_L12
differential pair D_B14_L13: +B14_P_L13 -B14_N_L13
differential pair D_B14_L14: +B14_P_L14 -B14_N_L14
differential pair D_B14_L15: +B14_P_L15 -B14_N_L15
differential pair D_B14_L16: +B14_P_L16 -B14_N_L16
differential pair D_B14_L17: +B14_P_L17 -B14_N_L17
differential pair D_B14_L18: +B14_P_L18 -B14_N_L18
differential pair D_B14_L19: +B14_P_L19 -B14_N_L19
differential pair D_B14_L20: +B14_P_L20 -B14_N_L20
differential pair D_B14_L21: +B14_P_L21 -B14_N_L21
differential pair D_B14_L22: +B14_P_L22 -B14_N_L22
differential pair D_B14_L23: +B14_P_L23 -B14_N_L23
differential pair D_B14_L24: +B14_P_L24 -B14_N_L24
differential pair D_B16_L1: +B16_P_L1 -B16_N_L1
differential pair D_B16_L2: +B16_P_L2 -B16_N_L2
differential pair D_B16_L3: +B16_P_L3 -B16_N_L3
differential pair D_B16_L4: +B16_P_L4 -B16_N_L4
differential pair D_B16_L5: +B16_P_L5 -B16_N_L5
differential pair D_B16_L6: +B16_P_L6 -B16_N_L6
differential pair D_B16_L7: +B16_P_L7 -B16_N_L7
differential pair D_B16_L8: +B16_P_L8 -B16_N_L8
differential pair D_B16_L9: +B16_P_L9 -B16_N_L9
differential pair D_B16_L10: +B16_P_L10 -B16_N_L10
differential pair D_B16_L11: +B16_P_L11 -B16_N_L11
differential pair D_B16_L12: +B16_P_L12 -B16_N_L12
differential pair D_B16_L13: +B16_P_L13 -B16_N_L13
differential pair D_B16_L14: +B16_P_L14 -B16_N_L14
differential pair D_B16_L15: +B16_P_L15 -B16_N_L15
differential pair D_B16_L16: +B16_P_L16 -B16_N_L16
differential pair D_B16_L17: +B16_P_L17 -B16_N_L17
differential pair D_B16_L18: +B16_P_L18 -B16_N_L18
differential pair D_B16_L19: +B16_P_L19 -B16_N_L19
differential pair D_B16_L20: +B16_P_L20 -B16_N_L20
differential pair D_B16_L21: +B16_P_L21 -B16_N_L21
differential pair D_B16_L22: +B16_P_L22 -B16_N_L22
differential pair D_B16_L23: +B16_P_L23 -B16_N_L23
differential pair D_B16_L24: +B16_P_L24 -B16_N_L24
differential pair D_MGT_CLK0: +MGT_CLK0_P -MGT_CLK0_N
differential pair D_MGT_CLK1: +MGT_CLK1_P -MGT_CLK1_N
differential pair D_MGT_RX_0: +MGT_RX_P_0 -MGT_RX_N_0
differential pair D_MGT_RX_1: +MGT_RX_P_1 -MGT_RX_N_1
differential pair D_MGT_RX_2: +MGT_RX_P_2 -MGT_RX_N_2
differential pair D_MGT_RX_3: +MGT_RX_P_3 -MGT_RX_N_3
differential pair D_MGT_TX_0: +MGT_TX_P_0 -MGT_TX_N_0
differential pair D_MGT_TX_1: +MGT_TX_P_1 -MGT_TX_N_1
differential pair D_MGT_TX_2: +MGT_TX_P_2 -MGT_TX_N_2
differential pair D_MGT_TX_3: +MGT_TX_P_3 -MGT_TX_N_3
differential pair ddr3_clk: +DDR3_CLK_P -DDR3_CLK_N
differential pair ddr3_dqs1: +DDR3_DQS_P1 -DDR3_DQS_N1
differential pair ddr3_dqs0: +DDR3_DQS_P0 -DDR3_DQS_N0

## Components (designator, comment, footprint, x,y, rotation, side; value= is the part's Value field where it differs from the comment)
*1 "M3" "M3 125X200"#1 -50,0 r0 top locked
*2 "M3" "M3 125X200"#2 1336,580 r0 top locked
*3 "M3" "M3 125X200"#3 -56,2358 r0 top locked
*4 "M3" "M3 125X200"#4 2396,-170 r0 top locked
C1 "22uf" C0603_L 151,2194 r180 top
C2 "4.7uf" C0402_L 1295.28,835 r0 bottom
C3 "0.1uf" C0402_L 1306,736 r135 bottom
C4 "0.1uf" C0402_L 1206,691 r45 bottom
C5 "0.1uf" C0402_L 1046.47,770.47 r45 bottom
C6 "0.1uf" C0402_L 1090,650 r45 bottom
C7 "22uf" C0603_L 279,2195 r180 top
C8 "22uf" C0603_L 281,2067 r180 top
C9 "22uf" C0603_L 279,2131 r180 top
C10 "22uf" C0603_L 279,2323 r180 top
C11 "22uf" C0603_L 1297,319 r90 top
C12 "4.7uf" C0402_L 1196,1090 r270 bottom
C13 "0.1uf" C0402_L 1125,1216 r180 bottom
C14 "0.1uf" C0402_L 1213,953 r180 bottom
C15 "0.1uf" C0402_L 1330,1140 r315 bottom
C16 "0.1uf" C0402_L 1281,1255 r315 bottom
C17 "0.1uf" C0402_L 611,2138 r180 top
C18 "4.7uf" C0402_L 610,2092 r180 top
C19 "22uf" C0603_L 1438,2381 r180 top
C20 "4.7uf" C0402_L 1075,1487 r90 bottom
C21 "0.1uf" C0402_L 1090,1337 r180 bottom
C22 "0.1uf" C0402_L 1057.72,1188 r0 bottom
C23 "0.1uf" C0402_L 903.28,1154 r180 bottom
C24 "0.1uf" C0402_L 1005.47,1317.47 r45 bottom
C25 "22uf" C0603_L 477,525 r270 bottom
C26 "4.7uf" C0402_L 772,688 r45 bottom
C27 "0.1uf" C0402_L 946,596 r270 bottom
C28 "0.1uf" C0402_L 521,576.72 r270 bottom
C29 "0.1uf" C0402_L 628,658 r135 bottom
C30 "0.1uf" C0402_L 725,814 r90 bottom
C31 "4.7uf" C0402_L 303,2416 r180 top
C32 "4.7uf" C0402_L 283,2374 r180 top
C33 "4.7uf" C0402_L 278.28,1975 r180 top
C34 "4.7uf" C0402_L 280,2020 r180 top
C35 "0.1uf" C0402_L 1151,509 r90 top
C36 "0.1uf" C0402_L 482,1798 r180 bottom
C37 "10uf" C0603_L 404,1889 r270 top
C38 "0.1uf" C0402_L 486,1925 r180 top
C39 "22uf" C0603_L 600,2054 r180 bottom
C40 "4.7uf" C0402_L 774,1125 r45 bottom
C41 "0.1uf" C0402_L 970.47,1438.47 r45 bottom
C42 "0.1uf" C0402_L 862,1271 r0 bottom
C43 "0.1uf" C0402_L 672,1359 r135 bottom
C44 "0.1uf" C0402_L 731.47,1240.47 r45 bottom
C45 "22uf" C0603_L 731,1966 r0 bottom
C46 "4.7uf" C0402_L 554,1300 r225 bottom
C47 "0.1uf" C0402_L 615,1202 r45 bottom
C48 "0.1uf" C0402_L 430.72,1268 r180 bottom
C49 "0.1uf" C0402_L 469,1152 r180 bottom
C50 "0.1uf" C0402_L 506,1436 r180 bottom
C51 "0.1uf" C0402_L 938,880 r0 bottom
C52 "0.1uf" C0402_L 825.28,877 r0 bottom
C53 "0.1uf" C0402_L 1020,881 r0 bottom
C54 "0.1uf" C0402_L 980,837 r0 bottom
C55 "0.1uf" C0402_L 745,961 r0 bottom
C56 "0.1uf" C0402_L 746,877 r0 bottom
C57 "0.1uf" C0402_L 746,919 r180 bottom
C58 "0.1uf" C0402_L 786.72,833 r0 bottom
C59 "0.1uf" C0402_L 737,1717 r180 bottom
C60 "22uf" C0603_L 1317,2157 r0 bottom
C61 "4.7uf" C0402_L 1314,2117 r0 bottom
C62 "4.7uf" C0402_L 1314.28,2092 r0 bottom
C63 "4.7uf" C0402_L 1313,2196 r0 bottom
C64 "0.1uf" C0402_L 1039,1013 r90 bottom
C65 "0.1uf" C0402_L 801,1051 r270 bottom
C66 "0.1uf" C0402_L 726,1049.72 r270 bottom
C67 "0.1uf" C0402_L 998,1054 r270 bottom
C68 "0.1uf" C0402_L 922,1054 r270 bottom
C69 "4.7uf" C0402_L 1081,1049 r270 bottom
C70 "0.1uf" C0402_L 645,1053 r270 bottom
C71 "22uf" C0603_L 278,2259 r180 top
C72 "0.1uf" C0402_L 780,997 r0 bottom
C73 "0.1uf" C0402_L 979,994 r0 bottom
C74 "22uf" C0603_L 463,2222 r90 top
C75 "10uf" C0603_L 626,178 r270 bottom
C76 "0.1uf" C0402_L 644,309 r0 bottom
C77 "0.1uf" C0402_L 917,32 r180 bottom
C78 "0.1uf" C0402_L 840,305 r180 bottom
C79 "0.1uf" C0402_L 607.72,22 r180 bottom
C80 "0.1uf" C0402_L 947,316 r90 bottom
C81 "0.1uf" C0402_L 514,19 r180 bottom
C82 "0.1uf" C0402_L 544,57 r180 bottom
C83 "0.01uf" C0402_L 626,259 r270 bottom
C84 "0.01uf" C0402_L 718,59 r0 bottom
C85 "0.01uf" C0402_L 469,75 r270 bottom
C86 "0.01uf" C0402_L 449,17 r180 bottom
C91 "10uf" C0603_L 1074.54,2033 r180 top
C92 "0.1uf" C0402_L 1056.72,2089 r180 top
C93 "0.1uf" C0402_L 1259.28,2281 r180 top
C94 "4.7uf" C0402_L 1259.07,2322.92 r180 top
C95 "10uf" C0603_L 892,2262 r270 bottom
C96 "0.1uf" C0402_L 1056,216 r270 top
C98 "0.1uf" C0402_L 890,2243.72 r270 top
C100 "0.1uf" C0402_L 1056,296 r270 top
C102 "10uf" C0603_L 955,2262 r270 bottom
C103 "0.1uf" C0402_L 543,2317.72 r90 top
C104 "22uf" C0603_L 528,2222.54 r270 top
C105 "220pf" C0402_L 591,2213.28 r90 top
C106 "0.1uf" C0402_L 1007,2245 r270 bottom
C107 "10uf" C0603_L 953,1921.46 r90 bottom
C108 "0.1uf" C0402_L 1006,1935 r90 bottom
C109 "0.1uf" C0402_L 1042.72,2167 r180 top
C110 "22uf" C0603_L 1140,2167 r0 top
C111 "220pf" C0402_L 1186,2404 r270 top
C112 "10uf" C0603_L 894,1915 r90 bottom
C113 "0.1uf" C0402_L 658,0 r90 bottom
C114 "0.1uf" C0402_L 897,1934.28 r90 top
C115 "0.1uf" C0402_L 1247,1826.28 r270 top
C116 "22uf" C0603_L 1250,1923 r90 top
C117 "220pf" C0402_L 1192,1965 r270 top
C118 "NC" C0402_L 815,2146 r0 bottom
C119 "0.01uf" C0402_L 942,2162 r90 bottom
C120 "0.01uf" C0402_L 833,2041 r0 bottom
C121 "0.1uf" C0402_L 728,2000 r0 top
C122 "22uf" C0603_L 633,2008 r180 top
C123 "220pf" C0402_L 595,1852.28 r90 top
C124 "0.01uf" C0402_L 987.68,2085.19 r180 bottom
E1 "10uF/10V" "CE D(6.3*7.7)" 1362,2119.11 r270 top
FB1 "100R@100MHz" FB0603 880,922 r270 bottom
FB2 "100R@100MHz" FB0603 402,2223 r270 top
FB3 "600R@100MHz" FB0603 1277,2376 r180 top
JP1 "Header 5X2" PHD2.0-LI-2x5P 1116.48,1646.63 r0 top
L1 "1uH" CD43 743,2310 r0 top
L2 "1uH" CD43 1038,2310 r180 top
L3 "1uH" CD43 1039,1875 r180 top
L4 "1uH" CD43 749,1864 r0 top
LED1 "绿色" LED0805_G 280,430 r270 top
LED2 "红色" LED0805_G 1326.12,1862 r90 top
LED3 "蓝色" LED0805_G 1426.12,1862 r90 top
LED4 "绿色" LED0805_G 283,247.6 r90 top
R1 "0" R0402_L 429,2102 r90 top
R2 "200R/NC" R0402_L 472,2102 r90 top
R3 "100R/NC" R0402_L 515,2102 r90 top
R4 "NC" R0603_L 461,2320 r180 top
R5 "NC" R0603_L 465,2004 r90 top
R6 "0" R0603_L 461,2381 r180 top
R7 "0" R0603_L 402,2004 r90 top
R8 "10K" R0402_L 1150,428.27 r90 top
R9 "1K" R0402_L 1138.83,979.17 r135 bottom
R10 "0" R0402_L 1094.83,972.17 r315 bottom
R11 "0" R0402_L 1099.27,913 r0 bottom
R12 "330R" R0402_L 216,470 r90 top
R13 "220R" R0402_L 216,396 r90 top
R14 "4.7K" R0402_L 1121,1049 r90 bottom
R15 "4.7K" R0402_L 957,1054 r90 bottom
R16 "4.7K" R0402_L 394,1639 r90 top
R17 "4.7K" R0402_L 394,1716 r270 top
R18 "4.7K" R0402_L 851,1663 r90 bottom
R19 "33R" R0402_L 959,1550 r90 bottom
R20 "33R" R0402_L 1038,1550 r90 bottom
R21 "30R" R0402_L 848,1567 r270 top
R22 "33R" R0402_L 1155,1561 r90 bottom
R23 "33R" R0402_L 1237,1558 r90 bottom
R24 "4.7K" R0402_L 1030,55 r0 top
R25 "100R" R0402_L 768,200 r180 bottom
R26 "1K" R0402_L 1012,216.27 r270 top
R28 "100R" R0402_L 777,49.27 r270 bottom
R29 "4.7K" R0402_L 744,328 r90 bottom
R30 "1K" R0402_L 1012,296.32 r270 top
R31 "1K" R0402_L 1505.73,1971 r0 top
R32 "1K" R0402_L 1506,1914 r0 top
R34 "67K" R0402_L 590,2374 r90 top
R35 "4.7K" R0402_L 740,-33 r180 top
R36 "100K" R0402_L 590,2288.73 r270 top
R37 "200K" R0402_L 1184,2243 r270 top
R39 "100K" R0402_L 1185,2323 r90 top
R46 "150K" R0402_L 1191,1809 r270 top
R48 "100K" R0402_L 815,2189 r180 bottom
R50 "100K" R0402_L 1192,1887 r90 top
R52 "100K" R0402_L 985,2162 r270 bottom
R56 "100K" R0402_L 833,1996 r180 bottom
R57 "240R" R0402_L 783,293 r270 bottom
R60 "510K" R0402_L 596,1930 r90 top
R61 "100K" R0402_L 987.8,2041.19 r0 bottom
R64 "100K" R0402_L 544,1942 r90 top
R65 "0" R0402_L 908.73,2042 r0 bottom
R66 "220R" R0402_L 209,275 r270 top
R68 "NC" R0402_L 908,2087 r180 bottom
SW1 "GT-TC029B" SW-SMD_L3.9-W2.9-P4.15-LS5.0 1182,268 r90 top
TP1 "TEST" "TEST 1.6" 674,2314 r180 bottom
TP2 "TEST" "TEST 1.6" 1184,2066 r180 top
TP3 "TEST" "TEST 1.6" 1107,2310 r180 bottom
TP4 "TEST" "TEST 1.6" 1106,1863 r0 bottom
TP5 "TEST" "TEST 1.6" 680,1850 r0 bottom
U1 "XC7A35T-2FGG484C" FGG484 881.57,1034.57 r90 top locked
U2 "BTB0.5-60F-2.0G" CONN-SMD_60P-P0.50_BTB0.5-60F-2.0G 1760,700 r90 bottom locked
U3 "BTB0.5-60F-2.0G" CONN-SMD_60P-P0.50_BTB0.5-60F-2.0G 1760,1658 r90 bottom locked
U4 "BTB0.5-60F-2.0G" CONN-SMD_60P-P0.50_BTB0.5-60F-2.0G 0,1658 r90 bottom locked
U5 "BTB0.5-60F-2.0G" CONN-SMD_60P-P0.50_BTB0.5-60F-2.0G 0,700 r90 bottom locked
U6 "SPX3819M5-L-1-5" SPX3819M5-L-1-5 711.9,2134.06 r0 top
U7 "SPX3819M5-1-2" SOT-23-5_L2.9-W1.6-P0.95-LS2.8-BR 499,1827 r270 top
U8 "W25Q128JVSIQ" SOIC-8W 619,1642 r0 top
U9 "NT5CB128M16IP-DI_C9900104358" TFBGA-96_L13.0-W8.0-R16-C6-P0.80-TL 680.74,156.67 r90 top locked
U10 "EA3059" "QFN24 4X4_M" 894,2091 r90 top
USBC1 "TYPE-C 2.0 -16P" USB-C-SMD_16P 1420.47,32.57 r180 top
X1 "80M" OSC-3225-4P 1258,482 r0 top

## Footprints (in the part's own frame and the unit in brackets; to place one, negate y for a bottom-side part, rotate by r counter-clockwise, add the part's x,y. Pads: shape width x height; smd on the part's side, far side on the other; paste and mask are expansions set on the pad)
C0402_L [mm]
  rect 0.5x0.5 smd: 1(-0.45,0) 2(0.45,0)
  silkscreen extent -0.87,-0.46 0.88,0.46, body extent -0.5,-0.25 0.5,0.25, height 0.5
C0603_L [mm]
  rect 0.75x0.85 smd: 1(-0.725,0) 2(0.725,0)
  silkscreen extent -1.35,-0.69 1.35,0.69, body extent -0.8,-0.4 0.8,0.4, height 0.8
CD43 [mm]
  rect 1.75x4.5 smd: 1(-1.75,0) 2(1.75,0)
  silkscreen extent -2.92,-2.54 2.92,2.54, body extent -2.21,-2 2.21,2, height 3.3
"CE D(6.3*7.7)" [mm]
  rect 2.7x1 smd: 1(3,0)
  oval 2.7x1 smd: 2(-3,0)
  silkscreen extent -3.3,-3.3 3.43,3.3, body extent -3.5,-3.3 3.5,3.3, height 7.75
CONN-SMD_60P-P0.50_BTB0.5-60F-2.0G [mm]
  rect 0.25x1.15 smd paste+0 mask+0.051: 1(-7.25,-2.425) 2(-7.25,2.425) 3(-6.75,-2.425) 4(-6.75,2.425) 5(-6.25,-2.425) 6(-6.25,2.425) 7(-5.75,-2.425) 8(-5.75,2.425) 9(-5.25,-2.425) 10(-5.25,2.425) 11(-4.75,-2.425) 12(-4.75,2.425) 13(-4.25,-2.425) 14(-4.25,2.425) 15(-3.75,-2.425) 16(-3.75,2.425) 17(-3.25,-2.425) 18(-3.25,2.425) 19(-2.75,-2.425) 20(-2.75,2.425) 21(-2.25,-2.425) 22(-2.25,2.425) 23(-1.75,-2.425) 24(-1.75,2.425) 25(-1.25,-2.425) 26(-1.25,2.425) 27(-0.75,-2.425) 28(-0.75,2.425) 29(-0.25,-2.425) 30(-0.25,2.425) 31(0.25,-2.425) 32(0.25,2.425) 33(0.75,-2.425) 34(0.75,2.425) 35(1.25,-2.425) 36(1.25,2.425) 37(1.75,-2.425) 38(1.75,2.425) 39(2.25,-2.425) 40(2.25,2.425) 41(2.75,-2.425) 42(2.75,2.425) 43(3.25,-2.425) 44(3.25,2.425) 45(3.75,-2.425) 46(3.75,2.425) 47(4.25,-2.425) 48(4.25,2.425) 49(4.75,-2.425) 50(4.75,2.425) 51(5.25,-2.425) 52(5.25,2.425) 53(5.75,-2.425) 54(5.75,2.425) 55(6.25,-2.425) 56(6.25,2.425) 57(6.75,-2.425) 58(6.75,2.425) 59(7.25,-2.425) 60(7.25,2.425)
  rect 1.6x2.2 smd paste+0 mask+0.051: 61(-9.45,0) 62(9.45,0)
  round 0.65 hole 0.65 unplated paste+0: ""(-8.5,0) ""(8.5,0)
  silkscreen extent -9.8,-2.4 9.8,2.4
FB0603 [mm]
  rect 0.75x0.85 smd: 1(-0.725,0) 2(0.725,0)
  silkscreen extent -1.35,-0.69 1.35,0.69, body extent -0.8,-0.4 0.8,0.4, height 0.8
FGG484 [mm]
  round 0.5 smd: A1(-10.5,10.5) A2(-9.5,10.5) A3(-8.5,10.5) A4(-7.5,10.5) A5(-6.5,10.5) A6(-5.5,10.5) A7(-4.5,10.5) A8(-3.5,10.5) A9(-2.5,10.5) A10(-1.5,10.5) A11(-0.5,10.5) A12(0.5,10.5) A13(1.5,10.5) A14(2.5,10.5) A15(3.5,10.5) A16(4.5,10.5) A17(5.5,10.5) A18(6.5,10.5) A19(7.5,10.5) A20(8.5,10.5) A21(9.5,10.5) A22(10.5,10.5) AA1(-10.5,-9.5) AA2(-9.5,-9.5) AA3(-8.5,-9.5) AA4(-7.5,-9.5) AA5(-6.5,-9.5) AA6(-5.5,-9.5) AA7(-4.5,-9.5) AA8(-3.5,-9.5) AA9(-2.5,-9.5) AA10(-1.5,-9.5) AA11(-0.5,-9.5) AA12(0.5,-9.5) AA13(1.5,-9.5) AA14(2.5,-9.5) AA15(3.5,-9.5) AA16(4.5,-9.5) AA17(5.5,-9.5) AA18(6.5,-9.5) AA19(7.5,-9.5) AA20(8.5,-9.5) AA21(9.5,-9.5) AA22(10.5,-9.5) AB1(-10.5,-10.5) AB2(-9.5,-10.5) AB3(-8.5,-10.5) AB4(-7.5,-10.5) AB5(-6.5,-10.5) AB6(-5.5,-10.5) AB7(-4.5,-10.5) AB8(-3.5,-10.5) AB9(-2.5,-10.5) AB10(-1.5,-10.5) AB11(-0.5,-10.5) AB12(0.5,-10.5) AB13(1.5,-10.5) AB14(2.5,-10.5) AB15(3.5,-10.5) AB16(4.5,-10.5) AB17(5.5,-10.5) AB18(6.5,-10.5) AB19(7.5,-10.5) AB20(8.5,-10.5) AB21(9.5,-10.5) AB22(10.5,-10.5) B1(-10.5,9.5) B2(-9.5,9.5) B3(-8.5,9.5) B4(-7.5,9.5) B5(-6.5,9.5) B6(-5.5,9.5) B7(-4.5,9.5) B8(-3.5,9.5) B9(-2.5,9.5) B10(-1.5,9.5) B11(-0.5,9.5) B12(0.5,9.5) B13(1.5,9.5) B14(2.5,9.5) B15(3.5,9.5) B16(4.5,9.5) B17(5.5,9.5) B18(6.5,9.5) B19(7.5,9.5) B20(8.5,9.5) B21(9.5,9.5) B22(10.5,9.5) C1(-10.5,8.5) C2(-9.5,8.5) C3(-8.5,8.5) C4(-7.5,8.5) C5(-6.5,8.5) C6(-5.5,8.5) C7(-4.5,8.5) C8(-3.5,8.5) C9(-2.5,8.5) C10(-1.5,8.5) C11(-0.5,8.5) C12(0.5,8.5) C13(1.5,8.5) C14(2.5,8.5) C15(3.5,8.5) C16(4.5,8.5) C17(5.5,8.5) C18(6.5,8.5) C19(7.5,8.5) C20(8.5,8.5) C21(9.5,8.5) C22(10.5,8.5) D1(-10.5,7.5) D2(-9.5,7.5) D3(-8.5,7.5) D4(-7.5,7.5) D5(-6.5,7.5) D6(-5.5,7.5) D7(-4.5,7.5) D8(-3.5,7.5) D9(-2.5,7.5) D10(-1.5,7.5) D11(-0.5,7.5) D12(0.5,7.5) D13(1.5,7.5) D14(2.5,7.5) D15(3.5,7.5) D16(4.5,7.5) D17(5.5,7.5) D18(6.5,7.5) D19(7.5,7.5) D20(8.5,7.5) D21(9.5,7.5) D22(10.5,7.5) E1(-10.5,6.5) E2(-9.5,6.5) E3(-8.5,6.5) E4(-7.5,6.5) E5(-6.5,6.5) E6(-5.5,6.5) E7(-4.5,6.5) E8(-3.5,6.5) E9(-2.5,6.5) E10(-1.5,6.5) E11(-0.5,6.5) E12(0.5,6.5) E13(1.5,6.5) E14(2.5,6.5) E15(3.5,6.5) E16(4.5,6.5) E17(5.5,6.5) E18(6.5,6.5) E19(7.5,6.5) E20(8.5,6.5) E21(9.5,6.5) E22(10.5,6.5) F1(-10.5,5.5) F2(-9.5,5.5) F3(-8.5,5.5) F4(-7.5,5.5) F5(-6.5,5.5) F6(-5.5,5.5) F7(-4.5,5.5) F8(-3.5,5.5) F9(-2.5,5.5) F10(-1.5,5.5) F11(-0.5,5.5) F12(0.5,5.5) F13(1.5,5.5) F14(2.5,5.5) F15(3.5,5.5) F16(4.5,5.5) F17(5.5,5.5) F18(6.5,5.5) F19(7.5,5.5) F20(8.5,5.5) F21(9.5,5.5) F22(10.5,5.5) G1(-10.5,4.5) G2(-9.5,4.5) G3(-8.5,4.5) G4(-7.5,4.5) G5(-6.5,4.5) G6(-5.5,4.5) G7(-4.5,4.5) G8(-3.5,4.5) G9(-2.5,4.5) G10(-1.5,4.5) G11(-0.5,4.5) G12(0.5,4.5) G13(1.5,4.5) G14(2.5,4.5) G15(3.5,4.5) G16(4.5,4.5) G17(5.5,4.5) G18(6.5,4.5) G19(7.5,4.5) G20(8.5,4.5) G21(9.5,4.5) G22(10.5,4.5) H1(-10.5,3.5) H2(-9.5,3.5) H3(-8.5,3.5) H4(-7.5,3.5) H5(-6.5,3.5) H6(-5.5,3.5) H7(-4.5,3.5) H8(-3.5,3.5) H9(-2.5,3.5) H10(-1.5,3.5) H11(-0.5,3.5) H12(0.5,3.5) H13(1.5,3.5) H14(2.5,3.5) H15(3.5,3.5) H16(4.5,3.5) H17(5.5,3.5) H18(6.5,3.5) H19(7.5,3.5) H20(8.5,3.5) H21(9.5,3.5) H22(10.5,3.5) J1(-10.5,2.5) J2(-9.5,2.5) J3(-8.5,2.5) J4(-7.5,2.5) J5(-6.5,2.5) J6(-5.5,2.5) J7(-4.5,2.5) J8(-3.5,2.5) J9(-2.5,2.5) J10(-1.5,2.5) J11(-0.5,2.5) J12(0.5,2.5) J13(1.5,2.5) J14(2.5,2.5) J15(3.5,2.5) J16(4.5,2.5) J17(5.5,2.5) J18(6.5,2.5) J19(7.5,2.5) J20(8.5,2.5) J21(9.5,2.5) J22(10.5,2.5) K1(-10.5,1.5) K2(-9.5,1.5) K3(-8.5,1.5) K4(-7.5,1.5) K5(-6.5,1.5) K6(-5.5,1.5) K7(-4.5,1.5) K8(-3.5,1.5) K9(-2.5,1.5) K10(-1.5,1.5) K11(-0.5,1.5) K12(0.5,1.5) K13(1.5,1.5) K14(2.5,1.5) K15(3.5,1.5) K16(4.5,1.5) K17(5.5,1.5) K18(6.5,1.5) K19(7.5,1.5) K20(8.5,1.5) K21(9.5,1.5) K22(10.5,1.5) L1(-10.5,0.5) L2(-9.5,0.5) L3(-8.5,0.5) L4(-7.5,0.5) L5(-6.5,0.5) L6(-5.5,0.5) L7(-4.5,0.5) L8(-3.5,0.5) L9(-2.5,0.5) L10(-1.5,0.5) L11(-0.5,0.5) L12(0.5,0.5) L13(1.5,0.5) L14(2.5,0.5) L15(3.5,0.5) L16(4.5,0.5) L17(5.5,0.5) L18(6.5,0.5) L19(7.5,0.5) L20(8.5,0.5) L21(9.5,0.5) L22(10.5,0.5) M1(-10.5,-0.5) M2(-9.5,-0.5) M3(-8.5,-0.5) M4(-7.5,-0.5) M5(-6.5,-0.5) M6(-5.5,-0.5) M7(-4.5,-0.5) M8(-3.5,-0.5) M9(-2.5,-0.5) M10(-1.5,-0.5) M11(-0.5,-0.5) M12(0.5,-0.5) M13(1.5,-0.5) M14(2.5,-0.5) M15(3.5,-0.5) M16(4.5,-0.5) M17(5.5,-0.5) M18(6.5,-0.5) M19(7.5,-0.5) M20(8.5,-0.5) M21(9.5,-0.5) M22(10.5,-0.5) N1(-10.5,-1.5) N2(-9.5,-1.5) N3(-8.5,-1.5) N4(-7.5,-1.5) N5(-6.5,-1.5) N6(-5.5,-1.5) N7(-4.5,-1.5) N8(-3.5,-1.5) N9(-2.5,-1.5) N10(-1.5,-1.5) N11(-0.5,-1.5) N12(0.5,-1.5) N13(1.5,-1.5) N14(2.5,-1.5) N15(3.5,-1.5) N16(4.5,-1.5) N17(5.5,-1.5) N18(6.5,-1.5) N19(7.5,-1.5) N20(8.5,-1.5) N21(9.5,-1.5) N22(10.5,-1.5) P1(-10.5,-2.5) P2(-9.5,-2.5) P3(-8.5,-2.5) P4(-7.5,-2.5) P5(-6.5,-2.5) P6(-5.5,-2.5) P7(-4.5,-2.5) P8(-3.5,-2.5) P9(-2.5,-2.5) P10(-1.5,-2.5) P11(-0.5,-2.5) P12(0.5,-2.5) P13(1.5,-2.5) P14(2.5,-2.5) P15(3.5,-2.5) P16(4.5,-2.5) P17(5.5,-2.5) P18(6.5,-2.5) P19(7.5,-2.5) P20(8.5,-2.5) P21(9.5,-2.5) P22(10.5,-2.5) R1(-10.5,-3.5) R2(-9.5,-3.5) R3(-8.5,-3.5) R4(-7.5,-3.5) R5(-6.5,-3.5) R6(-5.5,-3.5) R7(-4.5,-3.5) R8(-3.5,-3.5) R9(-2.5,-3.5) R10(-1.5,-3.5) R11(-0.5,-3.5) R12(0.5,-3.5) R13(1.5,-3.5) R14(2.5,-3.5) R15(3.5,-3.5) R16(4.5,-3.5) R17(5.5,-3.5) R18(6.5,-3.5) R19(7.5,-3.5) R20(8.5,-3.5) R21(9.5,-3.5) R22(10.5,-3.5) T1(-10.5,-4.5) T2(-9.5,-4.5) T3(-8.5,-4.5) T4(-7.5,-4.5) T5(-6.5,-4.5) T6(-5.5,-4.5) T7(-4.5,-4.5) T8(-3.5,-4.5) T9(-2.5,-4.5) T10(-1.5,-4.5) T11(-0.5,-4.5) T12(0.5,-4.5) T13(1.5,-4.5) T14(2.5,-4.5) T15(3.5,-4.5) T16(4.5,-4.5) T17(5.5,-4.5) T18(6.5,-4.5) T19(7.5,-4.5) T20(8.5,-4.5) T21(9.5,-4.5) T22(10.5,-4.5) U1(-10.5,-5.5) U2(-9.5,-5.5) U3(-8.5,-5.5) U4(-7.5,-5.5) U5(-6.5,-5.5) U6(-5.5,-5.5) U7(-4.5,-5.5) U8(-3.5,-5.5) U9(-2.5,-5.5) U10(-1.5,-5.5) U11(-0.5,-5.5) U12(0.5,-5.5) U13(1.5,-5.5) U14(2.5,-5.5) U15(3.5,-5.5) U16(4.5,-5.5) U17(5.5,-5.5) U18(6.5,-5.5) U19(7.5,-5.5) U20(8.5,-5.5) U21(9.5,-5.5) U22(10.5,-5.5) V1(-10.5,-6.5) V2(-9.5,-6.5) V3(-8.5,-6.5) V4(-7.5,-6.5) V5(-6.5,-6.5) V6(-5.5,-6.5) V7(-4.5,-6.5) V8(-3.5,-6.5) V9(-2.5,-6.5) V10(-1.5,-6.5) V11(-0.5,-6.5) V12(0.5,-6.5) V13(1.5,-6.5) V14(2.5,-6.5) V15(3.5,-6.5) V16(4.5,-6.5) V17(5.5,-6.5) V18(6.5,-6.5) V19(7.5,-6.5) V20(8.5,-6.5) V21(9.5,-6.5) V22(10.5,-6.5) W1(-10.5,-7.5) W2(-9.5,-7.5) W3(-8.5,-7.5) W4(-7.5,-7.5) W5(-6.5,-7.5) W6(-5.5,-7.5) W7(-4.5,-7.5) W8(-3.5,-7.5) W9(-2.5,-7.5) W10(-1.5,-7.5) W11(-0.5,-7.5) W12(0.5,-7.5) W13(1.5,-7.5) W14(2.5,-7.5) W15(3.5,-7.5) W16(4.5,-7.5) W17(5.5,-7.5) W18(6.5,-7.5) W19(7.5,-7.5) W20(8.5,-7.5) W21(9.5,-7.5) W22(10.5,-7.5) Y1(-10.5,-8.5) Y2(-9.5,-8.5) Y3(-8.5,-8.5) Y4(-7.5,-8.5) Y5(-6.5,-8.5) Y6(-5.5,-8.5) Y7(-4.5,-8.5) Y8(-3.5,-8.5) Y9(-2.5,-8.5) Y10(-1.5,-8.5) Y11(-0.5,-8.5) Y12(0.5,-8.5) Y13(1.5,-8.5) Y14(2.5,-8.5) Y15(3.5,-8.5) Y16(4.5,-8.5) Y17(5.5,-8.5) Y18(6.5,-8.5) Y19(7.5,-8.5) Y20(8.5,-8.5) Y21(9.5,-8.5) Y22(10.5,-8.5)
  silkscreen extent -12.27,-11.5 11.5,11.5, body extent -11.5,-11.5 11.5,11.5, height 2.56
LED0805_G [mil]
  rrect50% 40x50 smd: 1(-38.4,0) 2(38.4,0)
  silkscreen extent -70,-36 82,36, body extent -39,-25 39,25, height 32
"M3 125X200"#1 [mil]
  round 200 hole 125: 1(50,0)
"M3 125X200"#2 [mil]
  round 200 hole 125: 1(424,-580)
"M3 125X200"#3 [mil]
  round 200 hole 125: 1(56,0)
"M3 125X200"#4 [mil]
  round 200 hole 125: 1(-636,2528)
OSC-3225-4P [mm]
  rect 1.3x1.2 smd: 1(-1.05,-0.85) 2(1.05,-0.85) 3(1.05,0.85) 4(-1.05,0.85)
  silkscreen extent -2.03,-1.75 1.91,1.65, body extent -1.6,-1.25 1.6,1.25, height 0.7
PHD2.0-LI-2x5P [mm]
  rect 1.5x1.5 hole 0.8: 1(-4,-1)
  round 1.5 hole 0.8: 2(-4,1) 3(-2,-1) 4(-2,1) 5(0,-1) 6(0,1) 7(2,-1) 8(2,1) 9(4,-1) 10(4,1)
  silkscreen extent -6.02,-2.67 6,2.67, body extent -6,-2.5 6,2.5, height 6.55
"QFN24 4X4_M" [mm]
  rect 0.3x1 smd: 1(-1.25,-2)
  oval 0.3x1 smd: 2(-0.75,-2) 3(-0.25,-2) 4(0.25,-2) 5(0.75,-2) 6(1.25,-2) 13(1.25,2) 14(0.75,2) 15(0.25,2) 16(-0.25,2) 17(-0.75,2) 18(-1.25,2)
  oval 1x0.3 smd: 7(2,-1.25) 8(2,-0.75) 9(2,-0.25) 10(2,0.25) 11(2,0.75) 12(2,1.25) 19(-2,1.25) 20(-2,0.75) 21(-2,0.25) 22(-2,-0.25) 23(-2,-0.75) 24(-2,-1.25)
  rect 1x1 smd: 25(0,0)
  Top Layer region: -1,1 1,1 1,-1 -0.75,-1 -1,-0.75
  silkscreen extent -2.11,-2.6 2.11,2.11, body extent -2.01,-2.01 2.01,2.01, height 1.03
R0402_L [mm]
  rect 0.5x0.5 smd: 1(-0.425,0) 2(0.425,0)
  silkscreen extent -0.88,-0.46 0.87,0.46, body extent -0.5,-0.25 0.5,0.25, height 0.3
R0603_L [mm]
  rect 0.75x0.85 smd: 1(-0.725,0) 2(0.725,0)
  silkscreen extent -1.35,-0.69 1.35,0.69, body extent -0.8,-0.4 0.8,0.4, height 0.4
SOIC-8W [mil]
  oval 72x24 smd: 1(-148.35,75) 2(-148.35,25) 3(-148.35,-25) 4(-148.35,-75) 5(148.35,-75) 6(148.35,-25) 7(148.35,25) 8(148.35,75)
  silkscreen extent -155,-105 90,135, body extent -155,-104 155,104, height 75
SOT-23-5_L2.9-W1.6-P0.95-LS2.8-BR [mm]
  rect 1x0.6 smd paste+0 mask+0.05: 1(0.82,-0.886) 2(0.82,0.064) 3(0.82,1.013) 4(-1.38,1.014) 5(-1.38,-0.886)
  silkscreen extent -1.17,-1.46 1.88,1.46
SPX3819M5-L-1-5 [mm]
  rect 0.49x1.157 smd paste+0 mask+0.051: 1(-0.851,-1.093) 2(0.099,-1.093) 3(1.049,-1.093)
  rect 0.49x1.175 smd paste+0 mask+0.051: 4(1.049,1.214) 5(-0.851,1.214)
  silkscreen extent -1.7,-1.23 1.63,0.91
SW-SMD_L3.9-W2.9-P4.15-LS5.0 [mm]
  rect 1.35x2 smd paste+0 mask+0.051: 1(-2.25,0) 2(2.25,0)
  silkscreen extent -2,-1.45 2,1.45
"TEST 1.6" [mm]
  round 1.6 smd paste-1.6: 1(0,0)
  silkscreen extent -1.02,-1.02 1.01,1.02
TFBGA-96_L13.0-W8.0-R16-C6-P0.80-TL [mm]
  round 0.36 smd paste+0 mask+0.05: A1(-2.988,5.886) A2(-2.188,5.886) A3(-1.388,5.886) A7(1.812,5.886) A8(2.612,5.886) A9(3.412,5.886) B1(-2.988,5.085) B2(-2.188,5.086) B3(-1.388,5.086) B7(1.812,5.086) B8(2.612,5.086) B9(3.412,5.086) C1(-2.988,4.286) C2(-2.188,4.286) C3(-1.388,4.286) C7(1.812,4.286) C8(2.612,4.286) C9(3.412,4.286) D1(-2.988,3.486) D2(-2.188,3.486) D3(-1.388,3.486) D7(1.812,3.486) D8(2.612,3.486) D9(3.412,3.486) E1(-2.988,2.686) E2(-2.188,2.686) E3(-1.388,2.686) E7(1.812,2.686) E8(2.612,2.686) E9(3.412,2.686) F1(-2.988,1.886) F2(-2.188,1.886) F3(-1.388,1.886) F7(1.812,1.886) F8(2.612,1.886) F9(3.412,1.886) G1(-2.988,1.086) G2(-2.188,1.086) G3(-1.388,1.086) G7(1.812,1.086) G8(2.612,1.086) G9(3.412,1.086) H1(-2.988,0.286) H2(-2.188,0.286) H3(-1.388,0.286) H7(1.812,0.286) H8(2.612,0.286) H9(3.412,0.286) J1(-2.988,-0.514) J2(-2.188,-0.514) J3(-1.388,-0.514) J7(1.812,-0.514) J8(2.612,-0.514) J9(3.412,-0.514) K1(-2.988,-1.314) K2(-2.188,-1.314) K3(-1.388,-1.314) K7(1.812,-1.314) K8(2.612,-1.314) K9(3.412,-1.314) L1(-2.988,-2.114) L2(-2.188,-2.114) L3(-1.388,-2.114) L7(1.812,-2.114) L8(2.612,-2.114) L9(3.412,-2.114) M1(-2.988,-2.914) M2(-2.188,-2.914) M3(-1.388,-2.914) M7(1.812,-2.914) M8(2.612,-2.914) M9(3.412,-2.914) N1(-2.988,-3.714) N2(-2.188,-3.714) N3(-1.388,-3.714) N7(1.812,-3.714) N8(2.612,-3.714) N9(3.412,-3.714) P1(-2.988,-4.514) P2(-2.188,-4.514) P3(-1.388,-4.514) P7(1.812,-4.514) P8(2.612,-4.514) P9(3.412,-4.514) R1(-2.988,-5.314) R2(-2.188,-5.314) R3(-1.388,-5.314) R7(1.812,-5.314) R8(2.612,-5.314) R9(3.412,-5.314) T1(-2.988,-6.114) T2(-2.188,-6.114) T3(-1.388,-6.114) T7(1.812,-6.114) T8(2.612,-6.114) T9(3.412,-6.114)
  silkscreen extent -4.36,-6.69 4.29,6.69
USB-C-SMD_16P [mm]
  oval 1.2x2.3 hole 0.7 slot 1.8 at 90 deg: 0(-4.5,-1.675) 0(4.5,-1.675)
  oval 1.2x2 hole 0.8 slot 1.6 at 90 deg: 0(-4.5,2.475) 0(4.5,2.475)
  rect 0.3x1.15 smd: A1(3.35,-2.473) A4(2.55,-2.471) A5(1.25,-2.475) A6(0.25,-2.475) A7(-0.25,-2.473) A9(-2.55,-2.475) A12(-3.35,-2.475) B1(-3.05,-2.475) B4(-2.25,-2.475) B5(-1.75,-2.475) B6(-0.75,-2.475) B7(0.75,-2.473) B9(2.25,-2.471) B12(3.05,-2.473)
  rect 0.3x1.148 smd: A8(1.75,-2.475) B8(-1.25,-2.475)
  round 0.75 hole 0.75 unplated: ""(-2.89,-1.175) ""(2.89,-1.175)
  silkscreen extent -4.56,-2.75 4.5,5.08, body extent -4.45,-2.87 4.49,5.03, height 3.25

## Part data
*1 *2 *3 *4: "铜柱孔"
C1 C2 C3 C4 C5 C6 C7 C8 C9 C10 C11 C12 C13 C14 C15 C16 C17 C18 C19 C20 C21 C22 C23 C24 C25 C26 C27 C28 C29 C30 C31 C32 C33 C34 C35 C36 C37 C38 C39 C40 C41 C42 C43 C44 C45 C46 C47 C48 C49 C50 C51 C52 C53 C54 C55 C56 C57 C58 C59 C60 C61 C62 C63 C64 C65 C66 C67 C68 C69 C70 C71 C72 C73 C74 C75 C76 C77 C78 C79 C80 C81 C82 C83 C84 C85 C86 C91 C92 C93 C94 C95 C96 C98 C100 C102 C103 C104 C105 C106 C107 C108 C109 C110 C111 C112 C113 C114 C115 C116 C117 C118 C119 C120 C121 C122 C123 C124: library part C, "贴片电容/MLCC电容"
E1: library part CE_SMD, "贴片电解电容"
FB1 FB2 FB3: library part FB, "贴片磁珠"
JP1: "5*2P接插件"
L1 L2 L3 L4: library part L-SMD, "CD系列贴片线绕功率电感"
LED1 LED2 LED3 LED4: library part LED, "贴片LED"
R1 R2 R3 R4 R5 R6 R7 R8 R9 R10 R11 R12 R13 R14 R15 R16 R17 R18 R19 R20 R21 R22 R23 R24 R25 R26 R28 R29 R30 R31 R32 R34 R35 R36 R37 R39 R46 R48 R50 R52 R56 R57 R60 R61 R64 R65 R66 R68: library part R, "贴片电阻"
SW1: library part GT-TC029B-H020-L1N
TP1 TP2 TP3 TP4 TP5: "测试点"
U1: "Artix-7 FPGA, 250 User I/Os, 4 GTP, 484-Ball BGA, Speed Grade 2, Commercial Grade, Pb-Free"
U8: library part W25Q128, "SPI FLASH"
USBC1: library part USB2.0_Type-C_16Pin, "USB2.0_Type-C_16Pin母座"
X1: library part XTAL-ACT-4P, "4脚有源晶振(振荡器)"

## Via types
v1: diameter 17.7, hole 7.9, Top Layer to Bottom Layer, tented both sides, 807 vias

## Nets (pads, with @x,y where several pads share a name; then routed paths per layer and width w, separated by ;. In a path a pad name is that pad's centre, name@x,y a point inside that pad or via, vN(x,y) a via of type N, cw(c..) or ccw(c..) an arc to the next point about the centre after c; other vN are vias at no path point)
+1: C7.1 C8.1 C9.1 C10.1 C31.1 C32.1 C33.1 C34.1 C51.1 C52.1 C53.1 C54.1 C55.1 C56.1 C57.1 C58.1 C71.1 C72.1 C73.1 C103.1 C104.1 C105.1 FB2.1 L1.1 R34.2 TP1.1 U1.H8 U1.H10 U1.J7 U1.J9 U1.J11 U1.K8 U1.L7 U1.L11 U1.M8 U1.N7 U1.N11 U1.P8 U1.P10 U1.R7 U1.R9 U1.T8 U1.T10 | length 1091.1
  Top Layer w10: R34.2@590,2390.73 L1.1@669.27,2390.73 ; C105.1@591,2195.57 621.85,2226.42 655.42,2226.42 L1.1@678,2249
  Top Layer w12: C31.1@320.72,2416 v1(322,2416) ; FB2.1@402,2251.54 403.97,2251.54 427.73,2275.31 527.69,2275.31 528,2275 ; C104.1@528,2251.09 528,2275 ; R34.2@590,2390.73 577.67,2378.4 577.31,2378.4 570.16,2371.25 570.16,2309.16 564.84,2303.84 546.84,2303.84 C103.1@543,2300 528,2285 528,2275 ; v1(673.1,2427.1) 674.1,2426.1 L1.1@674.1,2310 L1.1@674,2310 ; v1(724.09,877.09) U1.H8@743.78,896.78 ; v1(724.09,957.99) 725.17,957.99 742.7,975.52 U1.H10@743.78,975.52 ; v1(763.46,995.2) U1.J11@783.15,1014.89 ; v1(763.64,923.58) 764.73,924.67 769.59,924.67 781.07,936.15 U1.J9@783.15,936.15 ; v1(765.41,836.02) 766.5,837.11 766.5,838.68 783.15,855.33 U1.J7@783.15,857.41 ; v1(803.07,875.41) 803.07,876.37 822.52,895.82 U1.K8@822.52,896.78 ; v1(842.2,837.72) U1.L7@861.89,857.41 ; v1(842.2,995.2) U1.L11@861.89,1014.89 ; U1.M8@901.26,896.78 v1(920.95,877.09) ; U1.N7@940.63,857.41 v1(960.32,837.72) ; U1.N11@940.63,1014.89 v1(960.32,995.2) ; U1.P8@980,896.78 v1(999.69,877.09) ; U1.P10@980,975.52 v1(999.69,955.83) ; U1.R7@1019.37,857.41 v1(1039.06,837.72) ; U1.R9@1019.37,936.15 v1(1039.06,916.46) ; U1.T8@1058.74,896.78 v1(1078.43,877.09) ; U1.T10@1058.74,975.52 v1(1078.43,955.83)
  other v1: 295.98,1973.58 296.98,2018.58 308.98,2065.58 308.98,2132.58 307.98,2193.58 528,2251 401,2252 306.98,2256.58 673,2282 673,2310.68 307.98,2321.58 673,2339.37 673,2368.05 300.98,2372.58 592,2391
+1.5: C25.1 C26.1 C27.1 C28.1 C29.1 C30.1 C75.1 C76.2 C77.2 C78.2 C79.2 C80.2 C81.2 C82.2 C83.2 C84.2 C85.2 C86.2 C96.2 C115.1 C116.1 C117.1 L3.1 R26.2 R46.2 TP4.1 U1.C1 U1.F2 U1.H6 U1.J3 U1.M4 U1.N1 U9.A1 U9.A8 U9.B2 U9.C1 U9.C9 U9.D2 U9.D9 U9.E9 U9.F1 U9.G7 U9.H2 U9.H9 U9.K2 U9.K8 U9.N1 U9.N9 U9.R1 U9.R9 | length 1767
  Top Layer w10: v1(433.5,23.5) U9.A1@449.03,39.03 ; v1(433.51,274.84) 433.59,274.84 448.94,259.5 U9.A8@449.02,259.5 ; v1(465,57.16) 466.08,57.16 479.44,70.51 U9.B2@480.52,70.51 ; v1@496.49,17.74 497.97,19.21 497.97,23.85 512.02,37.9 U9.C1@512.02,39.03 ; U9.C9@511.69,290.99 U9.C9@512.01,290.99 542.99,290.99 U9.D9@544,292 ; v1(526.85,55.16) 527.5,55.16 542.86,70.51 U9.D2@543.51,70.51 ; U9.D9@544,290 544,290.35 555.29,301.64 561.37,301.64 v1(562.84,303.11) 562.62,303.11 v1@559.21,306.51 ; v1@564.55,301.03 574.59,290.99 U9.E9@575,290.99 ; v1(591,21.84) 591,22.68 606.51,38.19 U9.F1@606.51,39.03 ; v1(625.32,241.78) 625.32,241.22 638,228.55 U9.G7@638,227.99 ; v1(653.19,55.62) 653.89,55.62 668.79,70.52 U9.H2@669.49,70.52 ; v1(659.44,306.32) 659.44,304.24 663.63,300.05 663.63,297.98 669.49,292.12 U9.H9@669.49,290.99 ; v1(728.73,59.13) 728.73,61.22 731.68,64.16 731.68,69.72 U9.K2@732.48,70.52 ; v1@731,57.84 732.29,59.13 753.01,59.13 757.53,54.61 770.44,54.61 779.9,45.16 779.9,30.1 808.36,1.64 816.64,1.64 826.98,11.98 U9.N1@826.98,39.03 ; U9.K8@732.48,259.5 733.61,259.5 745.64,271.52 748.53,271.52 v1(750,273) ; v1(821.95,297.16) U9.N9@826.56,292.56 ; U9.R1@889.97,39.03 890.76,38.23 896.22,38.23 900.66,33.79 v1(902.75,33.79) ; U9.R9@889.96,290.99 934.98,336.01 941.15,336.01 v1(942.48,337.34) ; v1@944,338 944.65,337.34 1068.65,337.34 1084,322 1084,226.28 C96.2@1056,198.28 C96.2@1055.86,198.14 ; R26.2@1012,199.54 1012.63,198.91 1055.09,198.91 C96.2@1055.86,198.14 ; C96.2@1053,197 1054.72,197 C96.2@1055.86,198.14 ; L3.1@1107.9,1875 1107.9,1929.13 1137.35,1958.58 1167.87,1958.58 1188,1978.72 C117.1@1188,1981 ; L3.1@1116,1807 1130.73,1792.27 R46.2@1191,1792.27
  Top Layer w12: v1(521.85,601.5) 522.94,602.59 526.25,602.59 544.85,621.19 U1.C1@546.93,621.19 ; v1(645.35,641.16) 645.49,641.16 664.9,660.56 U1.F2@665.04,660.56 ; v1(724.09,803.57) 725.18,804.67 728.33,804.67 741.7,818.04 U1.H6@743.78,818.04 ; v1(760.85,676.84) 760.85,677.23 783.15,699.54 U1.J3@783.15,699.93 ; U1.M4@901.26,739.3 902.46,739.3 922.14,719.61 v1(923.34,719.61) ; v1(937.4,615.34) 937.4,616.65 940.63,619.88 U1.N1@940.63,621.19 ; v1(1106,1761.66) L3.1@1106,1863 ; R46.2@1191,1792.27 1204.62,1805.89 1207.35,1805.89 1224.82,1823.35 1226.35,1823.35 ; C115.1@1247,1844 1227.16,1824.16 1227.16,1794.58 1233.02,1788.72 1260.98,1788.72 1282.84,1810.58 1282.84,1864.61 1267.61,1879.84 1266.58,1879.84 1251.97,1894.46 C116.1@1250,1894.46
  Bottom Layer w10: v1(625.32,241.78) 626,241.1 626,211 C75.1@627,210
  Bottom Layer w12: C25.1@478,550 478,552.57 520.75,595.33 520.75,600.41 v1(521.85,601.5)
  other v1: 490.27,17.49 1190,1793 1111,1830.63 1111,1859.32 1111,1888 1258,1900 1111,1916.68
+1.8: C60.1 C61.1 C62.1 C63.1 C64.1 C65.1 C66.1 C67.1 C68.1 C109.1 C110.1 C111.1 FB3.2 L2.1 R37.2 R56.2 R61.2 TP3.1 U1.E12 U1.H12 U1.K12 U1.M12 U1.P12 U1.R11 | length 1214.5
  Top Layer w10: C109.1@1063.47,2167 C110.1@1111.46,2167 1111.46,2168.97 1157.74,2215.26 ; L2.1@1115,2348 L2.1@1117,2346 ; L2.1@1116,2364 1116,2373.24 1161.16,2418.39 1182.68,2418.39 C111.1@1186,2421.72 ; L2.1@1122,2245 1122,2240.76 1147.51,2215.26 1157.74,2215.26 ; R37.2@1183,2223 1181.43,2221.43 1163.91,2221.43 1157.74,2215.26
  Top Layer w12: v1(606.73,1066.49) 607.83,1065.4 612.45,1065.4 623.59,1054.26 U1.E12@625.67,1054.26 ; v1(724.09,1073.95) U1.H12@743.78,1054.26 ; v1(801.85,1073.95) 802.34,1073.95 822.03,1054.26 U1.K12@822.52,1054.26 ; U1.M12@901.26,1054.26 v1(920.95,1073.95) ; U1.P12@980,1054.26 981.56,1054.26 998.14,1070.84 v1(999.69,1070.84) ; U1.R11@1019.37,1014.89 v1(1039.06,995.2) ; v1(1062.47,2168) 1063.47,2167 C109.1@1063.6,2166.87 ; L2.1@1106.9,2307.9 L2.1@1106.9,2310 ; C111.1@1186,2421.72 1220.98,2386.73 1239.69,2386.73 1250,2376.43 FB3.2@1250,2369
  Bottom Layer w12: R56.2@816.27,1996 829.89,1982.38 829.89,1973.11 867,1936 867,1867.82 873.13,1861.69 1016.69,1861.69 1033,1878 1033,2012.73 R61.2@1004.54,2041.19 1035.36,2072.02 1035.36,2159.36 1044,2168 v1(1062.47,2168)
  other v1: 1296.57,2092 1296.28,2117 1288.46,2157 1295.28,2196 1108,2285.63 1108,2314.32 1108,2343 1108,2371.68 1246,2377 1186,2422
+3.3: C1.1 C2.1 C3.1 C4.1 C5.1 C6.1 C11.1 C12.1 C13.1 C14.1 C15.1 C16.1 C19.1 C20.1 C21.1 C22.1 C23.1 C24.1 C35.2 C36.2 C59.1 C69.1 C70.1 C121.1 C122.1 C123.1 JP1.4 L4.1 LED3.1 R8.2 R9.1 R12.1 R14.1 R15.1 R16.2 R17.2 R18.2 R60.2 TP5.1 U1.AA7 U1.AA17 U1.AB4 U1.AB14 U1.F12 U1.M14 U1.P18 U1.R5 U1.R15 U1.T2 U1.T12 U1.T22 U1.U8 U1.U19 U1.V6 U1.V16 U1.W3 U1.W13 U1.Y10 U1.Y20 U2.2 U3.12 U3.50 U4.57 U6.3 U7.1 U7.3 U8.8 X1.4 | length 5073.4
  Top Layer w10: R60.2@596,1946.73 678.27,1946.73 L4.1@686,1939 ; C122.1@661.54,2008 661.54,1947.58 L4.1@662.13,1947 ; C122.1@663.51,2008 691.31,2008 694.46,2004.84 705.44,2004.84 C121.1@710.28,2000 710.28,2000.28 v1(712,2002)
  Top Layer w12: R12.1@216,453.27 216.76,452.51 242.38,452.51 v1(243.14,451.74) ; v1(390.93,1681.34) 392.02,1680.25 392.02,1657.71 R16.2@394,1655.73 ; v1@395,1682.56 395,1698.27 R17.2@394,1699.27 380.38,1712.89 380.02,1712.89 371,1721.91 371,1757 408.3,1794.3 v1(463.69,1794.3) 463.69,1787.25 479.69,1771.25 479.69,1770.88 485.55,1765.03 517.45,1765.03 524.6,1772.17 524.6,1772.54 538.9,1786.84 U7.3@538.9,1794.71 538.9,1802.58 544.71,1808.4 568.83,1808.4 C123.1@595,1834.57 651.65,1834.57 680.1,1863.02 L4.1@680.1,1864 L4.1@680.1,1870.1 ; v1(645.35,1073.95) U1.F12@665.04,1054.26 ; v1(753.21,2082.28) U6.3@753.21,2091.03 ; v1(755,1717) U8.8@756,1716 ; U8.8@763.28,1721.72 U8.8@768,1717 ; U8.8@767.35,1717 U8.8@768,1717 ; v1(853,1679) 815,1717 ; U1.M14@901.26,1133 901.26,1135.08 916.75,1150.57 916.75,1153.44 v1(917.85,1154.53) ; U1.P18@980,1290.48 980.16,1290.48 999.53,1309.84 v1(999.69,1309.84) ; U1.R5@1019.37,778.67 1021.45,778.67 1033.52,766.6 1037.97,766.6 v1(1039.06,765.51) ; U1.R15@1019.37,1172.37 1021.45,1172.37 1035.48,1186.4 1038.05,1186.4 v1(1039.14,1187.49) ; U1.T2@1058.74,660.56 1058.74,659.33 1077.89,640.18 v1(1077.89,638.96) ; U1.T12@1058.74,1054.26 1060.3,1054.26 1076.88,1070.84 v1(1078.43,1070.84) ; U1.T22@1058.74,1447.96 1058.74,1450.04 1074.9,1466.2 1074.9,1469.64 v1(1075.99,1470.74) ; U1.U8@1098.11,896.78 v1(1117.8,877.09) ; U1.U19@1098.11,1329.85 1100.19,1329.85 1108.06,1337.72 1114.17,1337.72 v1(1115.27,1338.81) ; U1.V6@1137.48,818.04 1137.48,817.79 1157.98,797.28 v1(1157.98,797.03) ; U1.V16@1137.48,1211.74 1139.56,1211.74 1145.33,1217.51 1149.16,1217.51 1151.02,1215.65 v1(1152.56,1215.65) ; R8.2@1152,443 R8.2@1150,445 1123,472 1123,498.72 C35.2@1151,526.72 1208.28,526.72 X1.4@1218.1,516.9 ; U1.W3@1176.85,699.93 1178.32,698.46 1178.32,685.91 1180.18,684.04 v1(1180.18,682.5) ; U1.W13@1176.85,1093.63 1178.21,1093.63 1194.75,1110.17 v1(1196.46,1110.17) ; U1.Y10@1216.22,975.52 1216.22,973.6 1234.02,955.8 v1(1234.02,954.26) ; U1.Y20@1216.22,1369.22 1218.3,1369.22 1233.96,1384.88 1239.94,1384.88 v1(1241.03,1385.97) ; X1.4@1216.66,515.46 1226,506.13 v1(1226,499) ; U1.AA7@1255.59,857.41 1255.59,855.33 1262.89,848.03 1262.89,839.67 v1(1263.98,838.58) ; U1.AA17@1255.59,1251.11 1257.67,1251.11 1269.4,1262.84 1272.38,1262.84 v1(1273.47,1263.93) 1273.47,1221.21 1275.62,1219.07 1275.62,1199.38 1283.29,1191.71 1307.62,1191.71 1314.65,1184.68 v1(1314.65,1156.51) 1313.56,1155.41 1313.56,1153.68 1294.96,1135.08 U1.AB14@1294.96,1133 ; U1.AB4@1294.96,739.3 1297.04,739.3 1312.09,724.25 1316.01,724.25 v1(1317.1,723.16) ; v1(1298.46,287) 1298.46,284.12 1305.31,277.27 1308.19,277.27 1362.46,223 1789,223 1823,257 v1(1823,407.11) ; LED3.1@1426.12,1823.6 1421.12,1823.6 1355.52,1758 1129,1758 1097.5,1726.5 1078.24,1726.5 JP1.4@1037.74,1686 998.21,1725.53 823.53,1725.53 815,1717 ; U8.8@768,1717 815,1717
  Layer 3 w12: v1(645.35,1073.95) 676.3,1043 811,1043 863,1095 863,1099.69 v1(917.85,1154.53) 938.31,1175 1007.49,1175 1018.89,1186.4 1038.05,1186.4 v1(1039.14,1187.49) ; v1(1039.06,765.51) 1065.99,738.57 1205.93,738.57 1207.5,737 1254,737 1267.85,723.16 v1(1317.1,723.16) ; v1(1117.8,877.09) 1137,857.89 1137,818.01 v1(1157.98,797.03)
  Layer 4 w12: v1(1039.14,1187.49) 1039.14,1189.04 1054.51,1204.41 1054.51,1210.51 1063,1219 1094,1219 1097.35,1215.65 v1(1152.56,1215.65)
  Bottom Layer w12: U4.57@-95.46,1923.74 -54.26,1923.74 v1(-54,1924) ; v1(712,2002) 696,2002 669,2029 669,2063.97 676.03,2071 712,2071 723.28,2082.28 v1(753.21,2082.28) ; C59.1@754.72,1717 v1(755,1717) ; R15.1@957,1037.27 977,1057.27 977,1083.84 984.22,1091.06 1058.21,1091.06 v1(1078.43,1070.84) 1095.79,1053.48 1099.79,1053.48 R14.1@1121,1032.27 1141.81,1011.45 1141.81,1003.54 1150.66,994.69 R9.1@1150.66,967.34 1170.35,947.65 1170.35,944.81 1181.51,933.66 1211.37,933.66 C14.1@1230.72,953 1231.97,954.26 v1(1234.02,954.26) ; v1(999.69,1309.84) 1001.23,1309.84 1019.07,1292 1090,1292 1098,1300 1098,1328 1102.91,1328 1113.72,1338.81 v1(1115.27,1338.81) ; v1(1793,1858) 1811.66,1858 1823.58,1846.08 1854.39,1846.08 U3.50@1855.47,1845 ; v1(1807,1472) 1808.02,1470.98 U3.12@1855.47,1470.98 ; v1(1823,407.11) 1823,407.53 1830.03,414.56 U2.2@1855.47,414.56
  other v1: 677.35,1798.89 677.35,1827.57 677.35,1856.25 677.35,1884.94 180,2192 1467,2382
+3.3_B: C17.1 C18.1 C39.1 C40.1 C41.1 C42.1 C43.1 C44.1 C45.1 C46.1 C47.1 C48.1 C49.1 C50.1 U1.A17 U1.B14 U1.C21 U1.D18 U1.E15 U1.F22 U1.G19 U1.H16 U1.J13 U1.K20 U1.L17 U1.N21 U6.5 | length 1278.3
  Top Layer w12: v1(449.74,1267.74) 450.65,1267.74 467.27,1251.11 U1.A17@468.19,1251.11 ; v1(487.87,1156.51) 488.96,1155.41 488.96,1153.68 507.56,1135.08 U1.B14@507.56,1133 ; v1(525.63,1431) 525.63,1430.44 546.93,1409.14 U1.C21@546.93,1408.59 ; v1(564.99,1312.51) 564.99,1312.14 586.3,1290.84 U1.D18@586.3,1290.48 ; v1(605.98,1192.06) U1.E15@625.67,1172.37 ; C18.1@626,2096 628.72,2098.72 C17.1@628.72,2138 655.46,2164.74 674.77,2164.74 678,2167.97 U6.5@678,2182.28 ; v1(627.72,2085.15) C18.1@627.72,2092 ; v1(656.95,1455.51) 657.22,1455.51 664.77,1447.96 U1.F22@665.04,1447.96 ; v1(684.32,1348.09) 685.24,1348.09 703.48,1329.85 U1.G19@704.41,1329.85 ; v1(725.15,1231.43) 725.15,1230.9 743.78,1212.27 U1.H16@743.78,1211.74 ; v1(763.46,1113.32) U1.J13@783.15,1093.63 ; v1(803.99,1390.1) 803.99,1388.92 822.52,1370.4 U1.K20@822.52,1369.22 ; v1(844.19,1270.8) 844.19,1269.8 861.89,1252.1 U1.L17@861.89,1251.11 ; U1.N21@940.63,1408.59 961.48,1429.45 961.48,1433.13 v1(962.57,1434.22)
  Layer 3 w12: v1(487.87,1156.51) 449.74,1194.64 v1(449.74,1267.74) 449.74,1269.28 468.46,1288 550,1288 550,1295.97 564.99,1310.96 v1(564.99,1312.51)
  Bottom Layer w12: v1(487.87,1156.51) 510.38,1134 574.49,1134 588,1147.51 588,1174.07 v1(605.98,1192.06) ; v1(627.72,2085.15) 628.13,2084.74 628.13,2054.41 627.72,2054 637.31,2044.41 637.31,2033.12 699,1971.43 v1(699,1968) ; v1(763.46,1113.32) 763.46,1115.91 745,1134.38 745,1204.97 752.03,1212 777.97,1212 785,1219.03 785,1242.77 792.03,1249.8 823.08,1249.8 844.08,1270.8 v1(844.19,1270.8)
  other v1: 699,2032 726,2032 754,2032 654,2158 681,2158 709,2158